# Altium PCB SPLCD V2.0.PcbDoc (part 1 of 2)
Units mm, origin at the board's own origin, x right, y up, seen from the top; angles counter-clockwise.
Board outline 130.07 x 120.05 mm, 4 copper layers (TopLayer, GND, PWR, BottomLayer); 221 components, 137 nets, 665 pads, 261 vias.
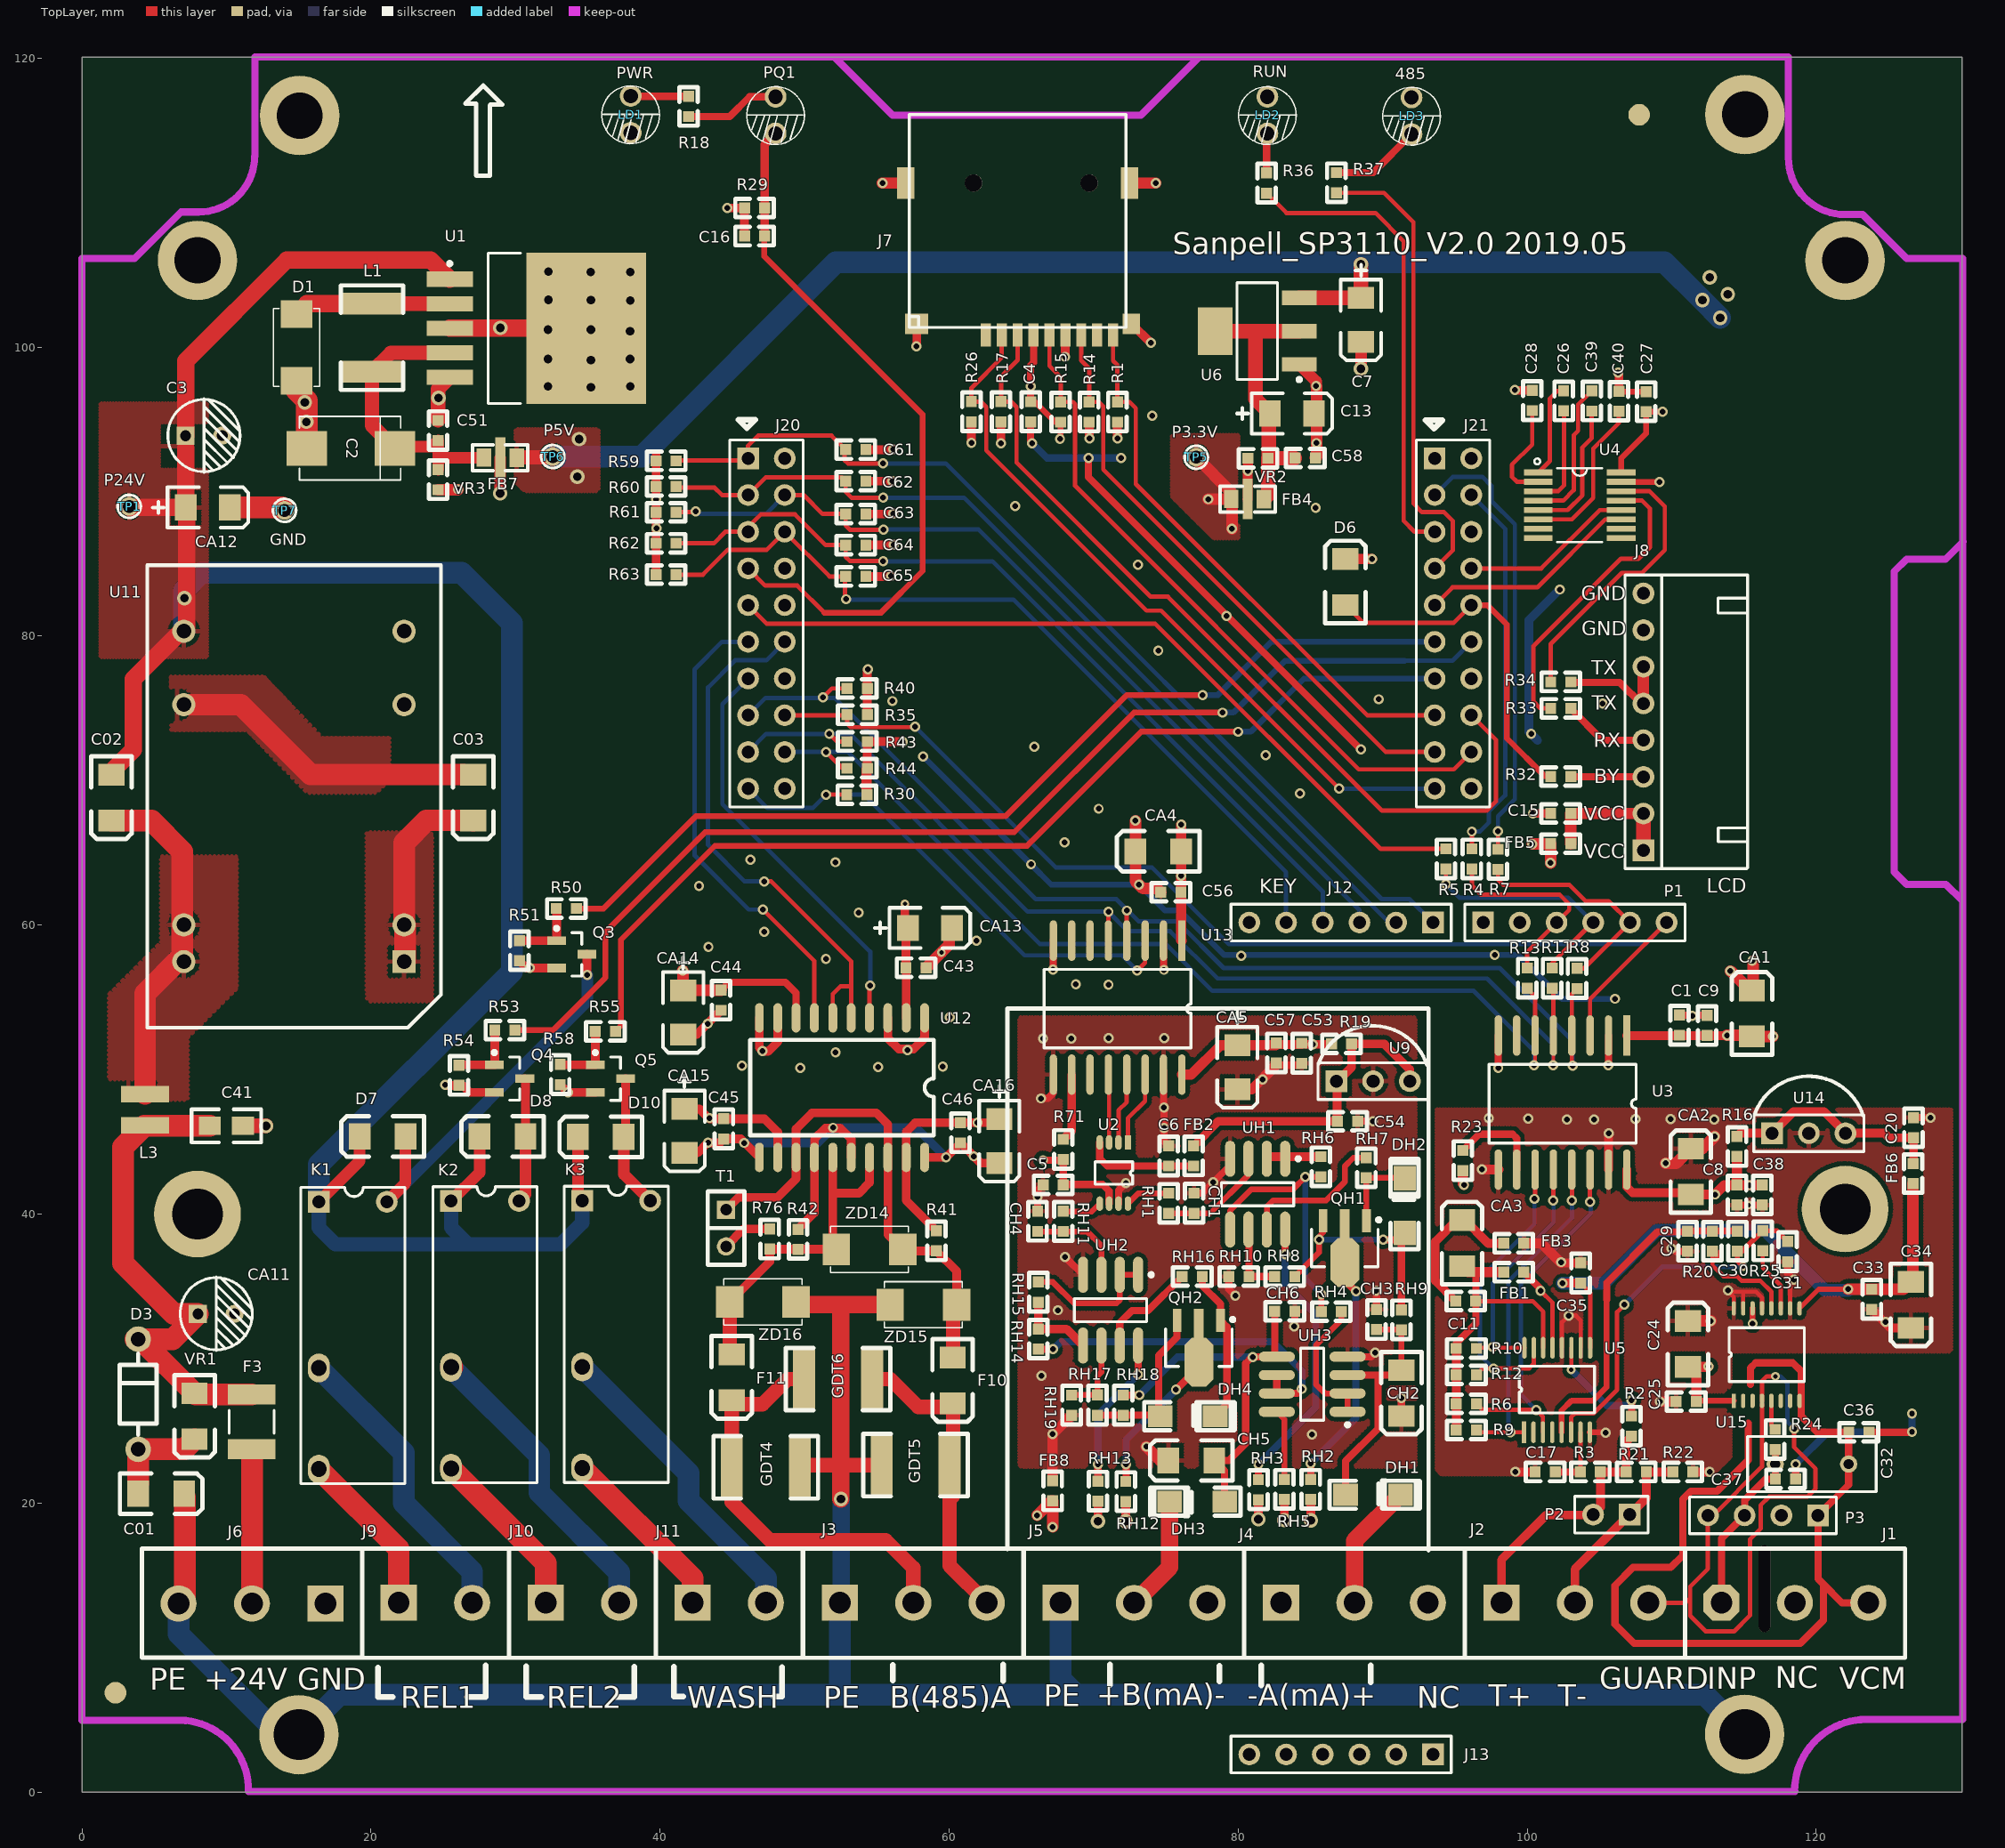
[diagram p0: TopLayer view]
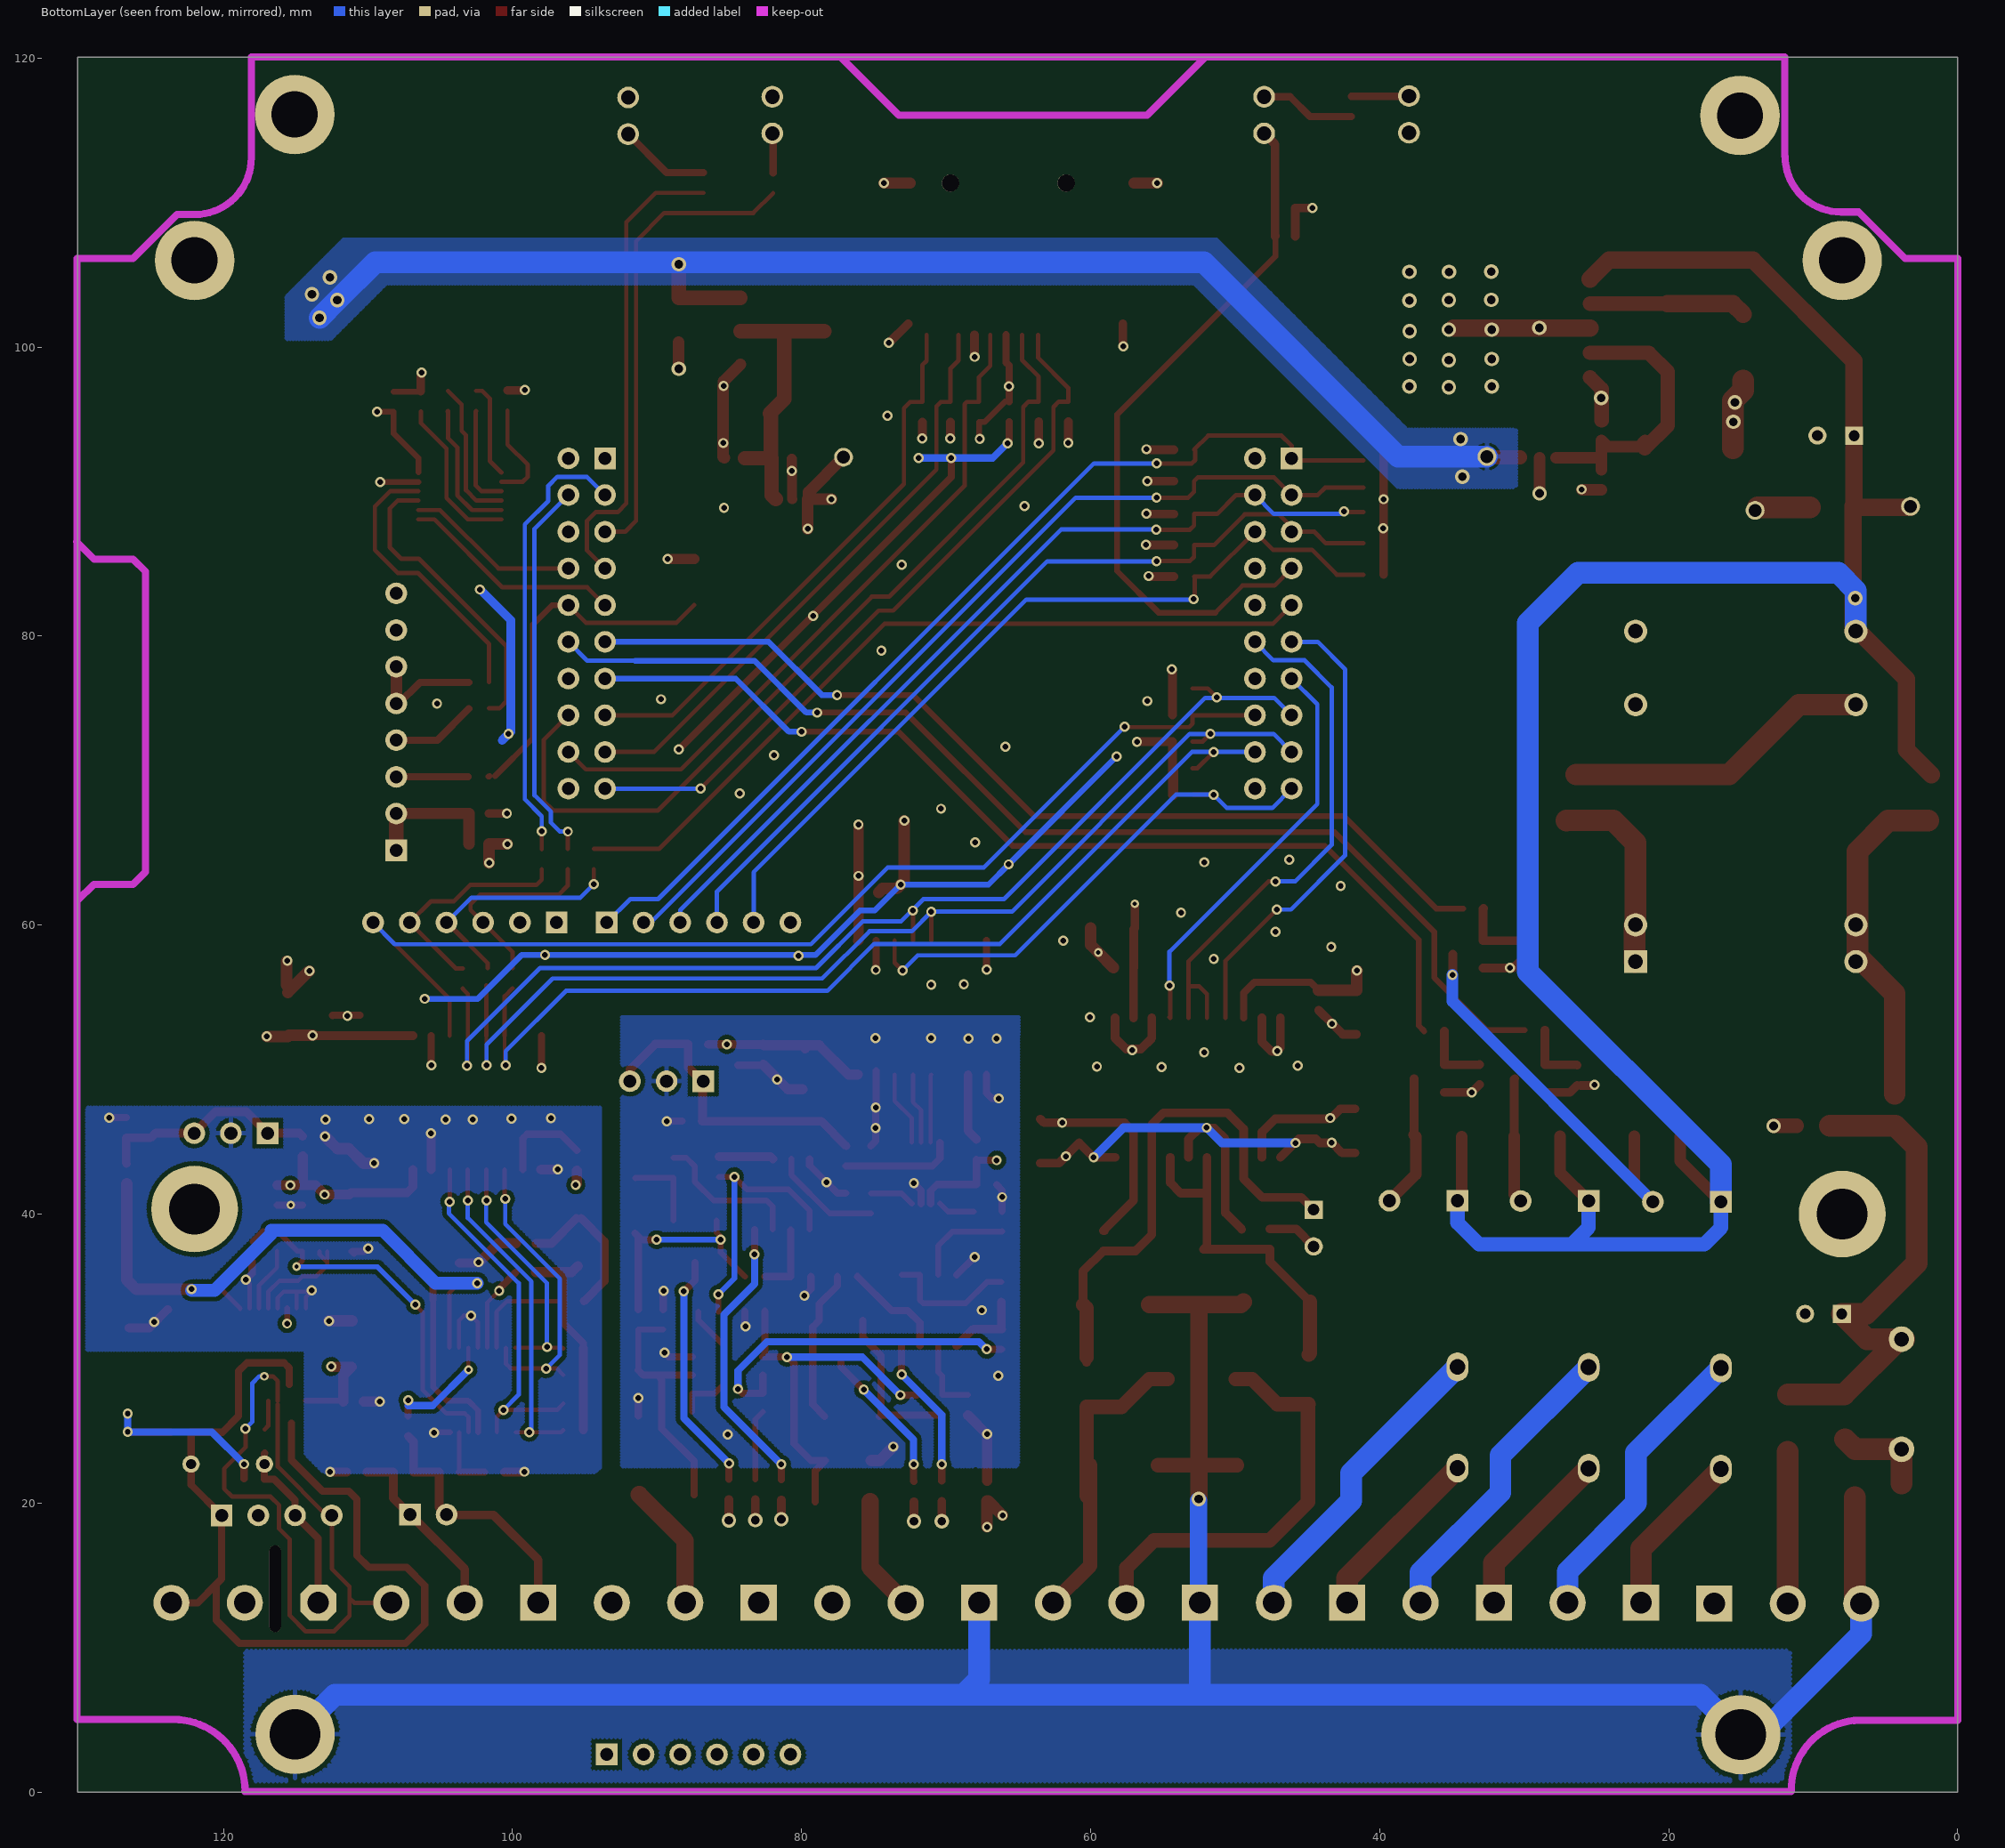
[diagram p1: BottomLayer view, seen from below]
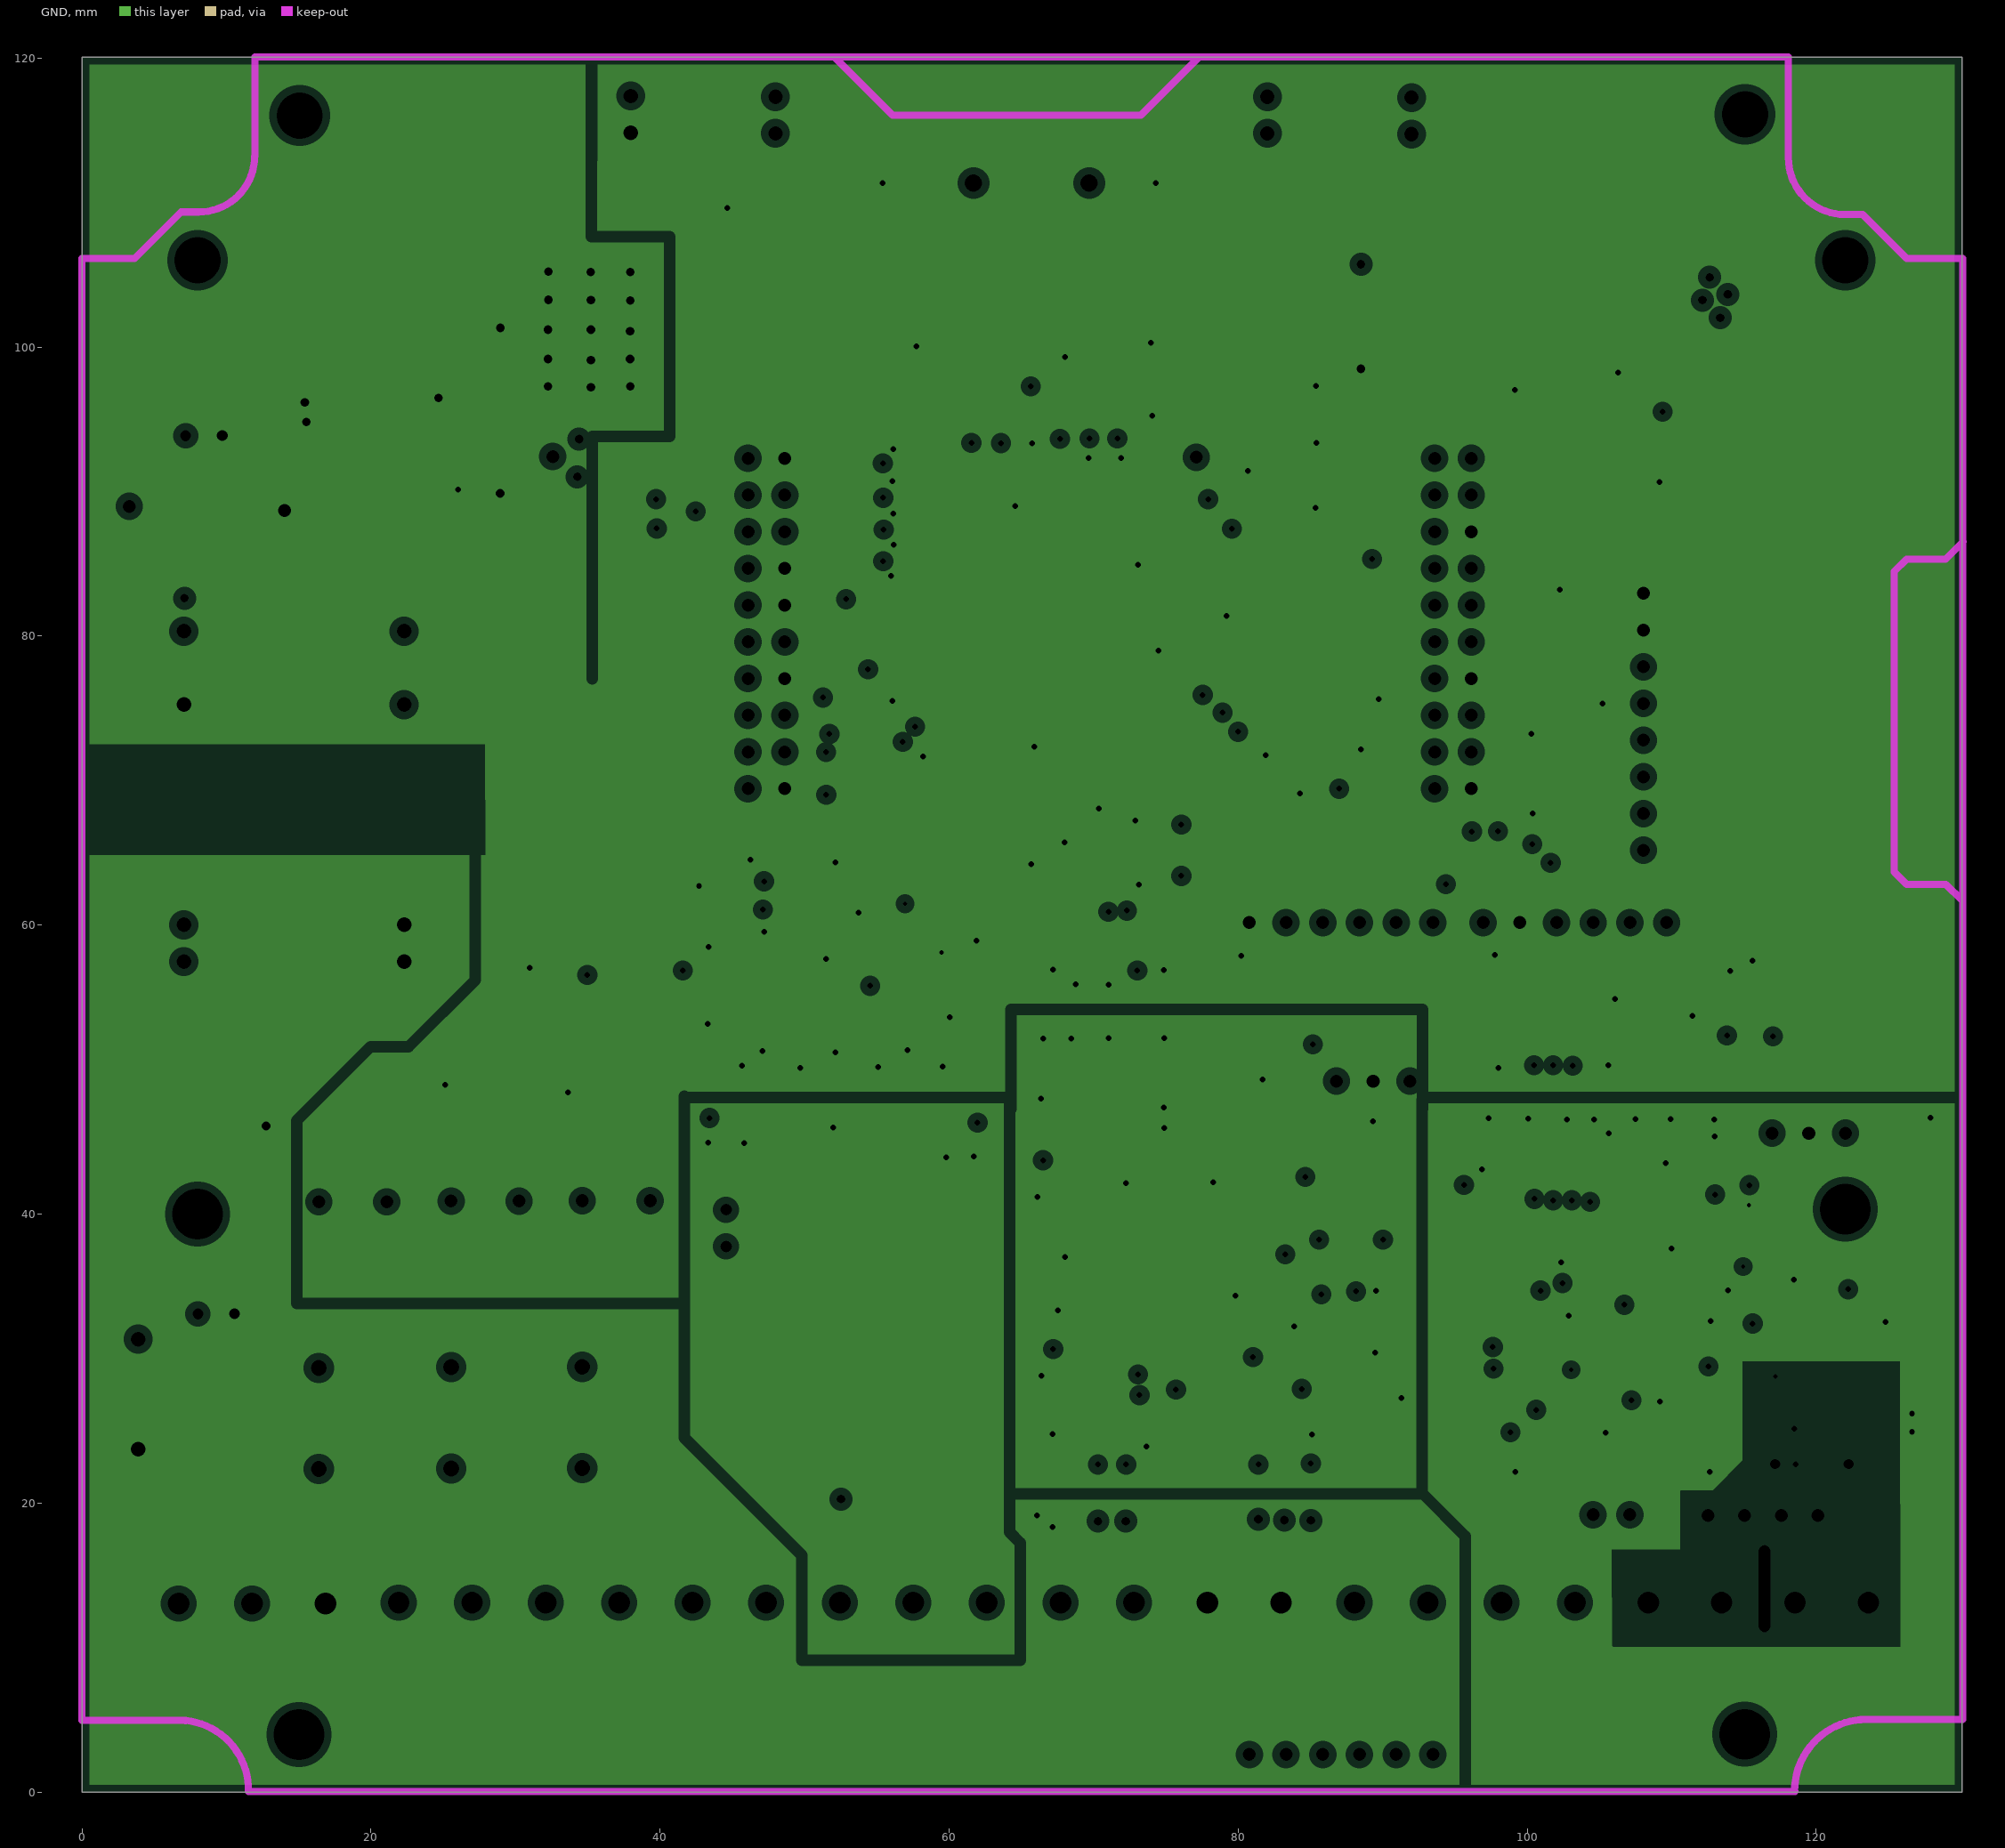
[diagram p2: GND, clearances drawn from the general rule]
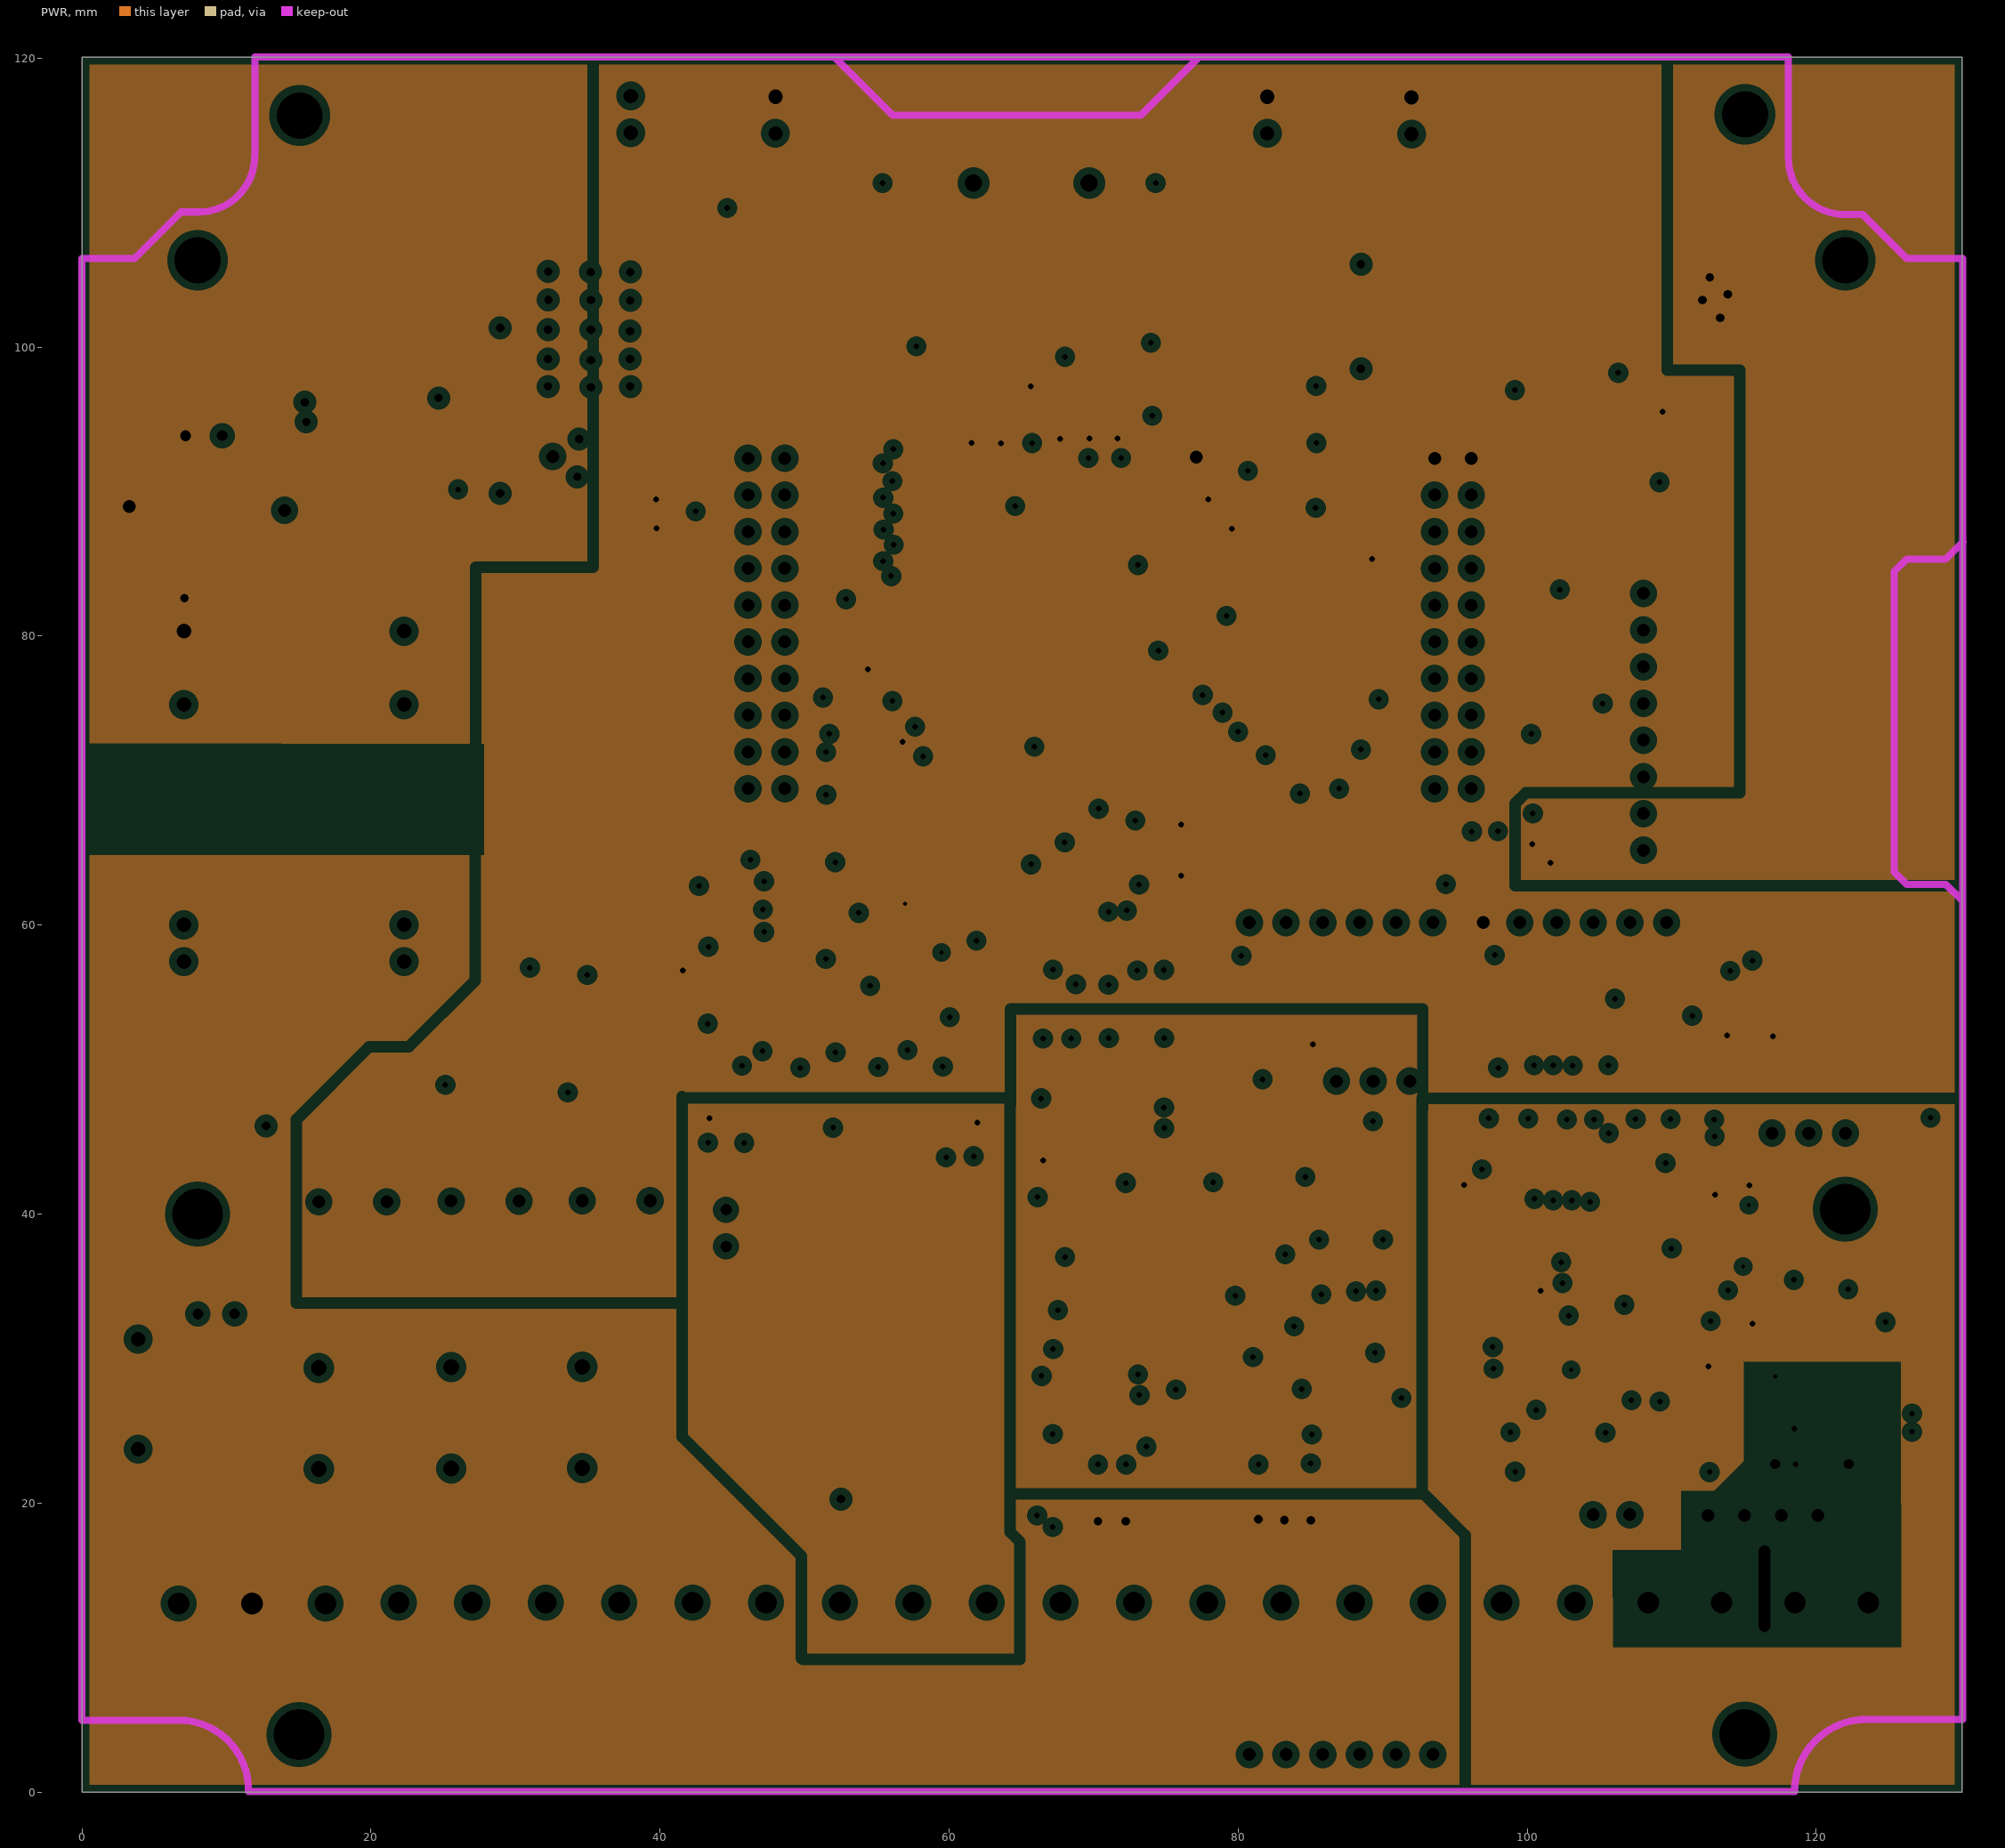
[diagram p3: PWR, clearances drawn from the general rule]

## Layer stack, top to bottom
TopLayer: signal copper 0.0356
Dielectric: core 0.32, FR-4, Dk 4.8
GND: plane copper 0.0356, net (Multiple Nets)
Dielectric: prepreg 0.32, FR-4, Dk 4.8
PWR: plane copper 0.0356, net (Multiple Nets)
Dielectric: core 0.32, FR-4, Dk 4.8
BottomLayer: signal copper 0.0356

## Board outline
0,0 130.075,0 130.075,120.05 0,120.05

## Design rules (kind name [scope] priority, off if disabled: settings)
Clearance Clearance_poly [InPolygon] p1: gap=0.3
Clearance [All] p2: gap=0.15
ComponentClearance [All] p1: gap=0.15 collisioncheckmode=3 verticalgap=0.254 showdistances=FALSE
FabricationTestPointUsage TestPointUsage [All] p1: valid=0 allowmultiple=FALSE
FabricationTestpoint Testpoint [All] p1: side=3 testpointundercomponent=TRUE minsize=1.016 maxsize=2.54 preferedsize=1.524 minholesize=0.508 maxholesize=1.016 preferedholesize=0.813 testpointgrid=0.025 allowsidetop=TRUE allowsidebottom=TRUE usegrid=TRUE gridtolerance=0
HoleSize [All] p1: absolutevalues=TRUE maxlimit=8 minlimit=0.025 maxpercent=80.000 minpercent=20.000
MinimumSolderMaskSliver [All] p1: minsoldermaskwidth=0.15
PlaneClearance [All] p1: clearance=0.5
PlaneConnect [All] p1: planeconnectstyle=Relief reliefexpansion=0.5 reliefentries=4 reliefconductorwidth=0.3 reliefairgap=0.3
PolygonConnect PolygonConnect_via [IsVia] p1: connectstyle=Direct reliefconductorwidth=0.254 reliefentries=4 polygonreliefangle="90 Angle"
PolygonConnect [All] p2: connectstyle=Relief reliefconductorwidth=0.3 reliefentries=4 polygonreliefangle="90 Angle"
RoutingVias [All] p1: holewidth=0.305 width=0.61 viastyle="Through Hole" minholewidth=0.254 minwidth=0.508 maxholewidth=2 maxwidth=5
SilkToSilkClearance [All] p1: silktosilkclearance=0
SilkscreenOverComponentPads [All] p1: minsilkscreentomaskgap=0
SolderMaskExpansion [All] p1: expansion=0.102
Width [All] p1: maxlimit=5.08 minlimit=0.1 preferedwidth=0.254
19 further rules are at their usual default settings.

## Classes and differential pairs
component class 06_POWER: C01 C2 C02 C03 C3 C7 C13 C41 C51 C58 CA11 CA12 D1 D3 F3 FB4 FB7 FB8 J6 L1 L3 LD1 R18 TP1 TP5 TP6 TP7 U1 U6 U11 VR1 VR2 VR3
component class 02_INTERFACE: C1 C4 C5 C6 C8 C9 C11 C15 C16 C17 C20 C24 C25 C26 C27 C28 C29 C30 C31 C32 C33 C34 C35 C36 C37 C38 C39 C40 C43 C44 C45 C46 C53 C54 C56 C57 C61 C62 C63 C64 C65 CA1 CA2 CA3 CA4 CA5 CA13 CA14 CA15 CA16 CH1 CH2 CH3 CH4 CH5 CH6 D6 D7 D8 D10 DH1 DH2 DH3 DH4 F10 F11 FB1 FB2 FB3 FB5 FB6 GDT4 GDT5 GDT6 J1 J2 J3 J4 J5 J7 J8 J9 J10 J11 J12 J13 J20 J21 K1 K2 K3 LD2 LD3 P1 P2 P3 PQ1 Q3 Q4 Q5 QH1 QH2 R1 R2 R3 R4 R5 R6 R7 R8 R9 R10 R11 R12 R13 R14 R15 R16 R17 R19 R20 R21 R22 R23 R24 R25 R26 R29 R30 R32 R33 R34 R35 R36 R37 R40 R41 R42 R43 R44 R50 R51 R53 R54 R55 R58 R59 R60 R61 R62 R63 R71 R76 RH1 RH2 RH3 RH4 RH5 RH6 RH7 RH8 RH9 RH10 RH11 RH12 RH13 RH14 RH15 RH16 RH17 RH18 RH19 T1 U2 U3 U4 U5 U9 U12 U13 U14 U15 UH1 UH2 UH3 ZD14 ZD15 ZD16

## Components (designator, comment, footprint, x,y, rotation, side; value= is the part's Value field where it differs from the comment)
C1 "10nF" 0603A 110.545,52.375 r90 top
C01 "1nF/2kV" 1206 6.95,20.65 r0 top
C2 "100uF/16V" D 21.65,93 r180 top
C02 "1nF/2kV" 1206 2.045,67.35 r270 top
C3 "100uF/50V" PCAP_100 7.175,93.875 r0 top
C03 "1nF/2kV" 1206 27.07,67.35 r270 top
C4 "0.1uF" 0603A 65.644,94.825 r90 top
C5 "0.1uF" 0603A 67.9,42.025 r180 top
C6 "0.1uF" 0603A 75.2,43.325 r90 top
C7 "10uF" 1206C 88.5,103.4 r270 top
C8 "0.1uF" 0603A 114.52,42.025 r270 top
C9 "0.1uF" 0603A 112.445,53.75 r270 top
C11 "0.1uF" 0603A 96.445,33.975 r180 top
C13 "22uF" 1206C 82.2,95.406 r0 top
C15 "0.1uF" 0603A 103.019,67.725 r180 top
C16 "0.1uF" 0603 47.244,107.675 r180 top
C17 "1uF" 0603A 101.945,22.15 r180 top
C20 "0.1uF" 0603A 126.725,45.275 r90 top
C24 "10uF" 1206 111.12,32.475 r90 top
C25 "0.1uF" 0603A 111.7,27.025 r180 top
C26 "0.1uF" 0603A 102.519,96.975 r270 top
C27 "0.1uF" 0603A 108.225,96.919 r270 top
C28 "0.1uF" 0603A 100.344,95.6 r90 top
C29 "0.1uF" 0603A 111.094,37.425 r90 top
C30 "100pF" 0603A 114.544,38.825 r270 top
C31 "0.1uF" 0603A 118.019,38.1 r270 top
C32 "1nF/2kV" RAD-0.2 119.7,22.7 r0 top
C33 "0.1uF" 0603A 123.85,34.8 r270 top
C34 "10uF" 1206 126.55,32.25 r270 top
C35 "0.1uF" 0603A 103.695,35.225 r90 top
C36 "1nF" 0603A 122.25,24.9 r0 top
C37 "1nF" 0603A 117.175,21.675 r0 top
C38 "0.1uF" 0603A 116.27,42.025 r270 top
C39 "0.1uF" 0603A 104.469,95.575 r90 top
C40 "0.1uF" 0603A 106.344,95.55 r90 top
C41 "1uF/50V" 0805 8.845,46.1 r0 top
C43 "0.1uF" 0603 57.02,57.05 r0 top
C44 "0.1uF" 0603 44.225,55.5 r270 top
C45 "0.1uF" 0603 44.42,46.597 r270 top
C46 "0.1uF" 0603 60.795,44.928 r90 top
C51 "0.1uF" 0603A 24.645,93.525 r90 top
C53 "0.1uF" 0603A 84.4,51.825 r270 top
C54 "0.1uF" 0603A 86.875,46.425 r0 top
C56 "0.1uF" 0603A 76.045,62.275 r180 top
C57 "0.1uF" 0603A 82.644,51.85 r270 top
C58 "0.1uF" 0603 83.95,92.331 r0 top
C61 "0.1uF" 0603A 52.844,92.9 r0 top
C62 "0.1uF" 0603A 52.844,90.725 r0 top
C63 "0.1uF" 0603A 52.844,88.45 r0 top
C64 "0.1uF" 0603A 52.844,86.3 r0 top
C65 "0.1uF" 0603A 52.844,84.125 r0 top
CA1 "10uF" 1206 115.55,55.345 r90 top
CA2 "10uF" 1206 111.32,44.4 r90 top
CA3 "10uF" 1206 95.495,39.45 r90 top
CA4 "10uF" 1206 73.02,65.1 r180 top
CA5 "10uF" 1206C 79.944,51.675 r270 top
CA11 "100uF/50V" PCAP_100 8.025,33.1 r0 top
CA12 "10uF/50V" 1206C 7.196,88.9 r0 top
CA13 "10uF" 1206C 57.145,59.8 r0 top
CA14 "10uF" 1206C 41.6,55.48 r270 top
CA15 "10uF" 1206C 41.695,47.275 r270 top
CA16 "10uF" 1206C 63.475,46.575 r270 top
CH1 "0.1uF" 0603A 76.95,41.45 r270 top
CH2 "10uF/50V" 1206 91.3,26.15 r270 top
CH3 "0.1uF" 0603A 89.575,33.4 r270 top
CH4 "0.1uF" 0603A 66.125,40.2 r270 top
CH5 "10uF/50V" 1206 75.3,22.95 r180 top
CH6 "0.1uF" 0603A 83.925,33.275 r180 top
D1 "SS34" ZD 14.85,97.675 r90 top
D3 "1N4007" 1N4007 3.895,23.725 r90 top
D6 "1N4148" 1206 87.425,85.2 r90 top
D7 "1N4148" 1206 19.344,45.375 r180 top
D8 "1N4148" 1206 27.644,45.375 r180 top
D10 "1N4148" 1206 34.444,45.35 r180 top
DH1 "1N4148" 1206D 87.625,20.575 r0 top
DH2 "1N4148" 1206D 91.525,38.875 r90 top
DH3 "1N4148" 1206D 78.875,20.1 r180 top
DH4 "1N4148" 1206D 74.8,26 r0 top
F3 "CC12H3A" 1812#1 11.745,25.625 r90 top
F10 "FUSE1" 1206 60.244,27.025 r270 top
F11 "FUSE1" 1206 44.969,27.25 r270 top
FB1 "BLM18PG600SN1" 0603A 99.77,35.975 r180 top
FB2 "BLM18PG600SN1" 0603A 76.925,44.725 r270 top
FB3 "BLM18PG600SN1" 0603A 99.77,37.975 r180 top
FB4 "NFM21PC105B1C3" NFM21PC105 81.8,89.481 r180 top
FB5 "BLM18PG600SN1" 0603A 103.019,65.625 r180 top
FB6 "BLM18PG600SN1" 0603A 126.7,43.5 r270 top
FB7 "NFM21PC105B1C3" NFM21PC105 27.802,92.34 r0 top
FB8 "BLM18PG600SN1" 0603 67.17,20.15 r90 top
GDT4 "SMD1812-091" 1812#2 44.969,22.475 r0 top
GDT5 "SMD1812-091" 1812#2 55.332,22.628 r0 top
GDT6 "SMD1812-091" 1812#2 49.97,28.575 r0 top
J1 "P3-5.08" PH3-5.08mm#1 113.444,13.1 r0 top locked
J2 "P3-5.08" PH3-5.08mm#2 98.219,13.1 r0 top
J3 "P3-5.08" PH3-5.08mm#2 52.444,13.1 r0 top
J4 "P3-5.08" PH3-5.08mm#2 82.969,13.1 r0 top
J5 "P3-5.08" PH3-5.08mm#2 67.719,13.1 r0 top
J6 "P3-5.08" PH3-5.08mm#2 16.844,13.05 r180 top
J7 "Header 10" "TF Socket" 64.744,100.85 r180 top
J8 "XH-8AW" HDR1X8 108.041,65.175 r90 top
J9 "P2-5.08" PH2-5.08mm 21.919,13.1 r0 top
J10 "P2-5.08" PH2-5.08mm 32.094,13.1 r0 top
J11 "P2-5.08" PH2-5.08mm 42.244,13.1 r0 top
J12 "Header 6" HDR1X6 93.475,60.175 r180 top
J13 "Header 6" HDR1X6 93.475,2.6 r180 top (schematic designator J12)
J20 "Header 10X2" HDR2X10 46.094,92.3 r270 top
J21 "Header 10X2" HDR2X10 93.594,92.3 r270 top
K1 "ALDP124" ALDP124 15.144,21.35 r0 top
K2 "ALDP124" ALDP124 24.294,21.4 r0 top
K3 "ALDP124" ALDP124 33.37,21.425 r0 top
L1 "47uH/1.5A" 1812#2 20.075,103 r270 top
L3 "4.7uH" LPS3010 4.37,46.15 r90 top
LD1 "PWR" LED 37.969,117.375 r270 top
LD2 "RUN" LED 82.019,117.325 r270 top
LD3 "485" LED 91.995,117.275 r270 top
P1 "Header 6" HDR1X6 96.95,60.175 r0 top
P2 "Header 2" HDR1X2 107.1,19.2 r180 top
P3 "Header 4" HDR1X4 120.125,19.15 r180 top
PQ1 "MI3-P" LED 47.994,117.325 r270 top
Q3 "MMBT3904" SOT23_N 33.894,57.975 r0 top
Q4 "MMBT3904" SOT23_N 29.594,49.375 r0 top
Q5 "MMBT3904" SOT23_N 36.569,49.375 r0 top
QH1 "2SD1624" SOT89M 87.375,37.65 r270 top
QH2 "2SD1624" SOT89M 77.275,30.75 r270 top
R1 "10K" 0603A 71.644,96.2 r270 top
R2 "0R" 0603A 107.22,24.625 r90 top
R3 "10K" 0603A 105.07,22.15 r180 top
R4 "0R" 0603A 96.175,65.275 r270 top
R5 "0R" 0603A 94.375,65.275 r270 top
R6 "100K" 0603A 95.095,26.875 r0 top
R7 "0R" 0603A 97.975,65.25 r270 top
R8 "0R" 0603A 103.45,57 r270 top
R9 "100K" 0603A 95.095,25.05 r0 top
R10 "100K" 0603A 95.095,30.7 r0 top
R11 "0R" 0603A 101.725,57.025 r270 top
R12 "100K" 0603A 95.095,28.875 r0 top
R13 "0R" 0603A 100,57.025 r270 top
R14 "10K" 0603A 69.694,96.2 r270 top
R15 "10K" 0603A 67.719,96.2 r270 top
R16 "330R" 0603A 114.52,45.375 r270 top
R17 "10K" 0603A 63.594,96.225 r270 top
R18 "1K" 0603A 41.969,117.35 r270 top
R19 "330R" 0603A 87.85,51.775 r180 top
R20 "1K" 0603A 112.819,37.425 r90 top
R21 "5K 0.1%" 0603A 108.245,22.15 r180 top
R22 "0R" 0603A 110.07,22.15 r0 top
R23 "4.7K" 0603A 95.545,44.4 r270 top
R24 "1K" 0603A 117.15,23.7 r90 top
R25 "1K" 0603A 116.294,37.45 r90 top
R26 "10K" 0603A 61.544,96.225 r270 top
R29 "10K" 0603A 45.844,109.625 r0 top
R30 "47K" 0603A 52.925,69.025 r0 top
R32 "NC" 0603A 103.019,70.275 r180 top
R33 "100R" 0603A 103.025,75 r180 top
R34 "100R" 0603A 103.025,76.825 r180 top
R35 "47K" 0603A 54.344,74.55 r180 top
R36 "1K" 0603A 81.969,110.65 r90 top
R37 "1K" 0603A 86.794,110.675 r90 top
R40 "47K" 0603A 54.344,76.375 r180 top
R41 "47K" 0603 59.119,38.85 r270 top
R42 "47K" 0603 49.544,37.55 r90 top
R43 "47K" 0603A 54.344,72.7 r180 top
R44 "47K" 0603A 54.344,70.85 r180 top
R50 "1K" 0603A 32.82,61.15 r0 top
R51 "100K" 0603A 30.269,58.925 r270 top
R53 "1K" 0603A 28.569,52.725 r0 top
R54 "100K" 0603A 26.094,50.3 r270 top
R55 "1K" 0603A 35.519,52.65 r0 top
R58 "100K" 0603A 33.094,50.35 r270 top
R59 "47K" 0603A 41.125,92.125 r180 top
R60 "47K" 0603A 41.119,90.35 r180 top
R61 "47K" 0603A 41.119,88.575 r180 top
R62 "47K" 0603A 41.119,86.425 r180 top
R63 "47K" 0603A 41.119,84.25 r180 top
R71 "4.7K" 0603A 67.9,43.775 r90 top
R76 "120R" 0603 47.594,37.575 r90 top
RH1 "10K" 0603A 75.2,40.05 r90 top
RH2 "100R 1%" 0603A 85.025,20.25 r90 top
RH3 "49.9" 0603A 81.4,20.225 r90 top
RH4 "100K" 0603A 85.75,33.25 r0 top
RH5 "49.9" 0603A 83.2,20.25 r90 top
RH6 "100K 0.1%" 0603A 85.725,42.575 r90 top
RH7 "10K" 0603A 88.875,43.9 r270 top
RH8 "100K" 0603A 82.525,35.675 r0 top
RH9 "100R 1%" 0603A 91.3,33.375 r270 top
RH10 "100K" 0603A 80.75,35.675 r180 top
RH11 "10K" 0603A 67.9,38.8 r90 top
RH12 "100R 1%" 0603A 72.225,20.1 r90 top
RH13 "49.9" 0603A 70.3,20.125 r90 top
RH14 "100K" 0603A 66.175,32.05 r270 top
RH15 "100K 0.1%" 0603A 66.175,33.9 r90 top
RH16 "10K" 0603A 76.125,35.675 r0 top
RH17 "100K" 0603A 70.275,27.475 r270 top
RH18 "100R 1%" 0603A 72.05,26.075 r90 top
RH19 "100K" 0603A 68.475,27.472 r270 top
T1 "" SIP2 44.569,40.3 r270 top
TP1 "P24V" "TEST POINT" 3.275,88.975 r0 top
TP5 "P3.3V" "TEST POINT" 77.1,92.375 r90 top
TP6 "P5V" "TEST POINT" 32.575,92.425 r270 top
TP7 "GND" "TEST POINT" 14.025,88.7 r0 top
U1 "LM2596S-5.0" TS5B_N 31.45,101.3 r0 top
U2 "LT2602IMS8" LT2602 71.35,42.825 r270 top
U3 "ADuM5401ARWZ" ADUM1401 106.895,52.35 r270 top
U4 "SP3232EEY-L" TSSOP-16 100.769,91.325 r0 top
U5 "AD7793BRU" AD7793 102.07,27.825 r90 top
U6 "LM1117IMP-3.3" MP04A_N 81.325,101.1 r180 top
U9 "TL431BCLP" HDR1X3 86.8,49.2 r0 top
U11 "URB2424ZP-6WR3" URB2424ZP-6WR3 22.295,57.473 r90 top
U12 "ADM2587E" SOL-20 58.305,53.575 r270 top
U13 "ADuM5401ARW" ADUM1401 76.105,58.925 r270 top
U14 "TL431BCLP" HDR1X3 116.945,45.6 r0 top
U15 "LMP91200" LMP91200 116.57,30.275 r0 top
UH1 "LM2904DMR2" SO8_M 81.35,41.375 r270 top
UH2 "LM2904DMR2" SO8_M 71.175,33.35 r270 top
UH3 "LM2904DMR2" SO8_M 85.125,28.225 r180 top
VR1 "V42MLA1206N" 1206 7.795,24.55 r270 top
VR2 "V3.5MLA0603N" 0603 80.675,92.306 r0 top (schematic designator VA1)
VR3 "V5.5MLA0603N" 0603 24.644,90.125 r90 top (schematic designator VA2)
ZD14 "SMBJ12" ZD 56.794,37.55 r180 top
ZD15 "SMBJ12" ZD 60.519,33.725 r180 top
ZD16 "SMBJ12" ZD 49.419,33.925 r180 top

## Footprints (in the part's own frame and the unit in brackets; to place one, negate y for a bottom-side part, rotate by r counter-clockwise, add the part's x,y. Pads: shape width x height; smd on the part's side, far side on the other; paste and mask are expansions set on the pad)
1N4007 [mil]
  round 70 hole 40: 1(0,0) 2(300,0)
  silkscreen extent 40,-50 260,50
0603 [mil]
  rect 30x30 smd: 1(0,0) 2(55,0)
  silkscreen extent -25,-25 80,25
0603A [mil]
  rect 30x30 smd: 1(0,0) 2(55,0)
  silkscreen extent -25,-25 80,25
0805 [mil]
  rect 60x50 smd: 1(0.39,0.31) 2(90.39,0.31)
  silkscreen extent -50,-45 140,45
1206 [mm]
  rect 1.5x1.8 smd: 1(-3.048,0) 2(0.127,0)
  silkscreen extent -4.32,-1.4 1.4,1.4
1206C [mm]
  rect 1.5x1.8 smd: 1(0,0) 2(3.048,0)
  silkscreen extent -2.29,-1.4 4.32,1.4
1206D [mm]
  rect 1.7x1.524 smd: 1(-0.19,0.003) 2(3.61,0.003)
  silkscreen extent -1.3,-0.97 4.96,0.99
1812#1 [mm] "Chip Capacitor, Body 4.5x3.2mm, IPC High Density"
  rect 1.4x3.3 smd: 1(-1.9,0) 2(1.9,0)
  silkscreen extent -0.8,-1.55 0.8,1.55, body extent -2.4,-1.7 2.4,1.7, height 1.4
1812#2 [mm]
  rect 1.524x4.175 smd: 1(0,0) 2(4.699,0)
  silkscreen extent -1.27,-2.16 5.97,2.16
AD7793 [mm]
  rect 1.5x0.3 smd: 1(-2.921,2.286)
  oval 1.5x0.3 smd: 2(-2.921,1.636) 3(-2.921,0.986) 4(-2.921,0.336) 5(-2.921,-0.314) 6(-2.921,-0.964) 7(-2.921,-1.614) 8(-2.921,-2.264) 9(2.921,-2.286) 10(2.921,-1.636) 11(2.921,-0.986) 12(2.921,-0.336) 13(2.921,0.314) 14(2.921,0.964) 15(2.921,1.614) 16(2.921,2.264)
  silkscreen extent -1.59,-2.59 1.64,2.61
ADUM1401 [mm]
  rect 2.8x0.51 smd: 1(0,0)
  oval 2.8x0.51 smd: 2(0,-1.27) 3(0,-2.54) 4(0,-3.81) 5(0,-5.08) 6(0,-6.35) 7(0,-7.62) 8(0,-8.89) 9(9.271,-8.89) 10(9.271,-7.62) 11(9.271,-6.35) 12(9.271,-5.08) 13(9.271,-3.81) 14(9.271,-2.54) 15(9.271,-1.27) 16(9.271,0)
  silkscreen extent 1.99,-9.53 7.43,0.64
ALDP124 [mm]
  oval 1.5x2 hole 1.1: 1(1.25,8) 7(1.25,1)
  round 1.5 hole 0.9: 3(5.95,19.5)
  rect 1.5x1.5 hole 0.9: 5(1.25,19.5)
  silkscreen extent 0,0 7.2,20.5
D [mil]
  rect 110x94.49 smd: 1(0,0) 2(240,0)
  silkscreen extent -16,-87 260,87
HDR1X2 [mm] "Connector; Header; 2 Position"
  rect 1.5x1.5 hole 0.9: 1(0,0)
  round 1.5 hole 0.9: 2(2.54,0)
  silkscreen extent -1.27,-1.27 3.81,1.27
HDR1X3 [mm] "Connector; Header; 3 Position"
  rect 1.5x1.5 hole 0.9: 1(0,0)
  round 1.5 hole 0.9: 2(2.54,0) 3(5.08,0)
  silkscreen extent -1.27,-1.27 6.35,1.27
HDR1X4 [mm] "Connector; Header; 4 Position"
  rect 1.5x1.5 hole 0.9: 1(0,0)
  round 1.5 hole 0.9: 2(2.54,0) 3(5.08,0) 4(7.62,0)
  silkscreen extent -1.27,-1.27 8.89,1.27
HDR1X6 [mm] "Connector; Header; 6 Position"
  rect 1.5x1.5 hole 0.9: 1(0,0)
  round 1.5 hole 0.9: 2(2.54,0) 3(5.08,0) 4(7.62,0) 5(10.16,0) 6(12.7,0)
  silkscreen extent -1.27,-1.27 13.97,1.27
HDR1X8 [mm] "Connector; Header; 8 Position"
  rect 1.5x1.5 hole 0.9: 1(0,0)
  round 1.5 hole 0.9: 2(2.54,0) 3(5.08,0) 4(7.62,0) 5(10.16,0) 6(12.7,0) 7(15.24,0) 8(17.78,0)
  silkscreen extent -1.27,-1.27 19.05,1.27
HDR2X10 [mm] "Connector; Header; 10x2 Position"
  rect 1.5x1.5 hole 0.9: 1(0,0)
  round 1.5 hole 0.9: 2(0,2.54) 3(2.54,0) 4(2.54,2.54) 5(5.08,0) 6(5.08,2.54) 7(7.62,0) 8(7.62,2.54) 9(10.16,0) 10(10.16,2.54) 11(12.7,0) 12(12.7,2.54) 13(15.24,0) 14(15.24,2.54) 15(17.78,0) 16(17.78,2.54) 17(20.32,0) 18(20.32,2.54) 19(22.86,0) 20(22.86,2.54)
  silkscreen extent -1.27,-1.27 24.13,3.81
LED [mm]
  round 1.5 hole 1: 1(0,0) 2(2.54,0)
  silkscreen extent -0.7,-2 3.3,2
LMP91200 [mm]
  rect 0.3x1 smd: 1(-2.275,-3.2)
  oval 0.3x1 smd: 2(-1.625,-3.2) 3(-0.975,-3.2) 4(-0.325,-3.2) 5(0.325,-3.2) 6(0.975,-3.2) 7(1.625,-3.2) 8(2.275,-3.2) 9(2.275,3.2) 10(1.625,3.2) 11(0.975,3.2) 12(0.325,3.2) 13(-0.325,3.2) 14(-0.975,3.2) 15(-1.625,3.2) 16(-2.275,3.2)
  silkscreen extent -2.6,-1.87 2.6,1.87
LPS3010 [mm]
  rect 1.14x3.3 smd: 1(0,0) 2(2.16,0)
LT2602 [mm]
  rect 1x0.45 smd: 1(-2.127,1.023)
  oval 1x0.45 smd: 2(-2.127,0.373) 3(-2.127,-0.277) 4(-2.127,-0.927) 5(2.103,-0.927) 6(2.103,-0.277) 7(2.103,0.373) 8(2.103,1.023)
  silkscreen extent -0.79,-1.25 0.77,1.35
MP04A_N [mm] "SOT223, 4-Leads, Body 6.5x3.5mm, Pitch 2.3mm, Lead Span 7mm, IPC Medium Density"
  rect 2.4x1 smd: 1(-2.9,2.3) 2(-2.9,0) 3(-2.9,-2.3)
  rect 2.4x3.3 smd: 4(2.9,0)
  silkscreen extent -3.03,-3.35 1.4,3.47, body extent -1.85,-3.35 1.85,3.35, height 1.8
NFM21PC105 [mm]
  rect 1x1.27 smd: 1(0.01,0.008) 2(2.286,0)
  rect 0.7x2.8 smd: 3(1.143,0)
  silkscreen extent -0.76,-0.89 3.05,0.89
PCAP_100 [mm]
  rect 1.25x1.25 hole 0.75: 1(0.001,-0.009)
  round 1.25 hole 0.75: 2(2.54,0)
  silkscreen extent -1.23,-2.54 3.77,2.54
PH2-5.08mm [mm]
  rect 2.5x2.5 hole 1.5: 1(0,0)
  round 2.5 hole 1.5: 2(5.08,0)
  silkscreen extent -2.54,-3.81 7.62,3.75
PH3-5.08mm#1 [mm]
  oct 2.5x2.5 hole 1.5: 1(0,0)
  round 2.5 hole 1.5: 2(5.08,0) 3(10.16,0)
  silkscreen extent -2.54,-3.81 12.7,3.75
PH3-5.08mm#2 [mm]
  rect 2.5x2.5 hole 1.5: 1(0,0)
  round 2.5 hole 1.5: 2(5.08,0) 3(10.16,0)
  silkscreen extent -2.54,-3.81 12.7,3.75
RAD-0.2 [mm] "Radial Cap, Thru-Hole; 2 Leads; 0.2 in Pin Spacing"
  round 1.2 hole 0.7: 1(-2.54,0) 2(2.54,0)
  silkscreen extent -4.44,-1.91 4.44,1.91
SIP2 [mil]
  rect 50x50 hole 32: 1(0,0)
  round 50 hole 32: 2(100,0)
  silkscreen extent -50,-50 150,50
SO8_M [mm] "SOIC, 8-Leads, Body 4.9x3.9mm, Pitch 1.27mm, IPC Low Density"
  oval 2.5x0.7 smd: 1(-2.45,1.905) 2(-2.45,0.635) 3(-2.45,-0.635) 4(-2.45,-1.905) 5(2.45,-1.905) 6(2.45,-0.635) 7(2.45,0.635) 8(2.45,1.905)
  silkscreen extent -2.57,-2.5 0.8,2.93, body extent -2,-2.5 2,2.5, height 1.75
SOL-20 [mil]
  oval 80x24 smd: 1(0,0) 2(0,-50) 3(0,-100) 4(0,-150) 5(0,-200) 6(0,-250) 7(0,-300) 8(0,-350) 9(0,-400) 10(0,-450) 11(380,-450) 12(380,-400) 13(380,-350) 14(380,-300) 15(380,-250) 16(380,-200) 17(380,-150) 18(380,-100) 19(380,-50) 20(380,0)
  silkscreen extent 60,-475 320,25
SOT23_N [mm] "SOT23, 3-Leads, Body 2.9x1.3mm, Pitch 0.95mm, Lead Span 2.3mm, IPC Medium Density"
  rect 1.3x0.6 smd: 1(-1.05,0.95) 2(-1.05,-0.95) 3(1.05,0)
  silkscreen extent -1.17,-1.5 0.7,1.92, body extent -0.7,-1.5 0.7,1.5, height 1.1
SOT89M [mm] "SOT89, 3-Leads, Body 4.5x2.4 mm, Pitch 1.5mm, Lead Span 4.1mm, IPC Low Density"
  rect 1.6x0.6 smd: 1(-1.9,1.5) 3(-1.9,-1.5)
  rect 2x0.7 smd: 2(-1.7,0)
  oct 3.4x2 smd: 2(1,0)
  silkscreen extent -2.07,-2.3 1.3,2.48, body extent -1.3,-2.3 1.3,2.3, height 1.6
"TEST POINT" [mm]
  round 1.3 hole 0.9: 1(0,0)
  silkscreen extent -0.8,-0.8 0.8,0.8
"TF Socket" [mm]
  rect 0.7x1.6 smd: 1(2.2,0) 2(1.1,0) 3(0,0) 4(-1.1,0) 5(-2.2,0) 6(-3.3,0) 7(-4.4,0) 8(-5.5,0) 9(-6.6,0)
  rect 1.2x1.4 smd: 10(-7.877,-0.762)
  rect 1.2x2.2 smd: 10(-7.75,-10.5) 10(7.75,-10.5)
  rect 1.6x1.4 smd: 10(6.977,-0.762)
  round 1.2 hole 1.2: ""(-4.95,-10.5) ""(3.05,-10.5)
  silkscreen extent -7.49,-15.24 7.49,-0.51
TS5B_N [mm] "D2-PAK, 6-Leads, Body 8.6x10.2mm, Pitch 1.7mm, Lead Span 14.1mm, IPC Medium Density"
  rect 3.2x1.05 smd: 1(-6,3.4) 2(-6,1.7) 3(-6,0) 4(-6,-1.7) 5(-6,-3.4)
  rect 8.3x10.45 smd: 6(3.45,0)
  silkscreen extent -6.12,-5.2 -1.1,5.2, body extent -3.35,-5.2 6.05,5.2, height 4.65
TSSOP-16 [mil]
  rect 78x16 smd: 1(0,0) 2(0,-25.59) 3(0,-51.18) 4(0,-76.77) 5(0,-102.36) 6(0,-127.95) 7(0,-153.54) 8(0,-179.13) 9(226,-179.13) 10(226,-153.54) 11(226,-127.95) 12(226,-102.36) 13(226,-76.77) 14(226,-51.18) 15(226,-25.59) 16(226,0)
  silkscreen extent -11,-190 174,38
URB2424ZP-6WR3 [mm] "isolated DC-DC converter, 6W"
  rect 1.6x1.6 hole 1.016: 2(0,0)
  round 1.6 hole 1.016: 3(2.54,0) 9(17.78,0) 11(22.86,0) 14(22.86,15.24) 16(17.78,15.24) 22(2.54,15.24) 23(0,15.24)
  silkscreen extent -4.57,-2.54 27.43,17.78
ZD [mm]
  rect 1.9x2.2 smd: 1(0,0) 2(4.6,0)
  silkscreen extent -0.4,-1.6 5,1.6

## Part data
C1 C8 C9 C11 C17 C43 C44 C45 C46: library part C, "电?"
C01 C02 C03 C4 C5 C6 C16 C20 C25 C29 C30 C31 C32 C33 C35 C36 C37 C38 C41 C51 C53 C54 C56 C57 C58 CH1 CH3 CH4 CH6: library part CAP, "Capacitor"
C2 C3 CA11 CA12 CA13 CA14 CA15 CA16 CH2 CH5: library part C, "极?"
C7 C13 C24 C34 CA1 CA2 CA3 CA4 CA5: library part CAPE, "极?"
C15 C61 C62 C63 C64 C65: library part Cap, "Capacitor, X7R Ceramic"
C26 C28 C39 C40: library part Cap, "'Capacitor, X7R Ceramic"
C27: library part CAP, "'Capacitor, X7R Ceramic"
D1: library part "D Schottky", "Schottky Diode"
D3: library part "Diode 1N4007", "1 Amp General Purpose Rectifier"
D6 D7 D8 D10: library part "Diode 1N4148", "High Conductance Fast Diode"
DH1 DH2 DH3 DH4: library part "Diode 1N4001", "1 Amp General Purpose Rectifier"
F3: library part FUSE1, "Fuse, 3A, 63Vdc"
F10 F11: "Fuse"
FB1 FB3 L3: library part INDUCTOR
FB2 FB4 FB5 FB6 FB7 FB8 L1: library part Inductor, "Inductor"
GDT4 GDT5 GDT6: library part BT90
J1 J2 J3 J4 J5 J6 QH1 QH2: library part "Header 3", "Header, 3-Pin"
J7: "Header, 10-Pin"
J8: library part "Header 8", "Header, 8-Pin"
J9 J10 J11: library part "Header 2", "Header, 2-Pin"
J12 J13 P1: "Header, 6-Pin"
J20 J21: "Header, 10-Pin, Dual row"
K1 K2 K3: library part S1A120000, "24V coil, 5A SPST Relay"
LD1 LD2 LD3: library part LED0, "Typical INFRARED GaAs LED"
P2: "Header, 2-Pin"
P3: "Header, 4-Pin"
PQ1: library part "Photo NPN", "NPN Phototransistor"
Q3 Q4 Q5: "NPN Switching Transistor"
R1 R4 R5 R7 R8 R11 R13 R14 R15 R17 R18 R26 R29 R30 R32 R33 R34 R35 R36 R37 R40 R43 R44 R50 R51 R53 R54 R55 R58 R59 R60 R61 R62 R63: library part RES, "电?"
R2 R3 R6 R9 R10 R12 R20 R21 R22 R23 R24 R25 R41 R42 R76: library part R, "电?"
R16 R19 R71 RH1 RH2 RH3 RH4 RH5 RH6 RH8 RH9 RH10 RH11 RH12 RH13 RH14 RH15 RH17 RH18 RH19: library part RE, "电?"
RH7 RH16: library part R, "Resistor"
T1: library part CON2, "Connector"
TP1 TP5 TP6 TP7: library part PAD
U1: "SIMPLE SWITCHER?Power Converter 150 KHz 3A Step-Down Voltage Regulator, 5-pin TO-263"
U2: library part LT2602
U3 U13: library part ADUM1401, "1Mbps Data Rate, 100ns Propagation delay"
U4: library part SP323
U5: library part AD7793
U6: "800mA Low-Dropout Linear Regulator, 4-pin SOT-223"
U9 U14: library part "Header 3", "Programmable Precision Reference"
UH1 UH2 UH3: library part AD8646
VR1: library part "Res Varistor", "Varistor (Voltage-Sensitive Resistor)"
VR2 VR3: library part "D Zener", "Zener Diode"
ZD14 ZD15 ZD16: library part SMBJ, "Ë²±"

## Free pads (board coordinates)
  round 1.5 smd: 0(2.325,6.875) 0(107.75,116.075)
  round 6 hole 3.5: 1(8,40) 1(122,40.35)
  round 5.5 hole 3.2: 1(8,106) 1(122,106) 4(15.069,116.025) 5(115.069,116.1)
  round 5.5 hole 3.5: 1(15.019,3.975) 2(115.044,4)
  oval 0.8x6 hole 0.8 slot 6 at 90 deg: ""(116.425,14.075)

## Via types
v1: diameter 0.7, hole 0.4, TopLayer to BottomLayer, 219 vias
v2: diameter 1, hole 0.6, TopLayer to BottomLayer, 36 vias
v3: diameter 0.6, hole 0.3, TopLayer to BottomLayer, 6 vias

## Nets (pads, with @x,y where several pads share a name; then routed paths per layer and width w, separated by ;. In a path a pad name is that pad's centre, name@x,y a point inside that pad or via, vN(x,y) a via of type N, cw(c..) or ccw(c..) an arc to the next point about the centre after c; other vN are vias at no path point)
24VGND_IN: C01.1 C03.2 C41.2 CA11.2 D3.1 FB8.1 J4.1 J5.3 J6.1 U11.2 U11.3 VR1.2 | length 25.1
  TopLayer w0.8: v1(66.095,19.15) 67.095,20.15 FB8.1@67.17,20.15 v1(67.17,18.35)
  TopLayer w1: C41.2@11.14,46.108 v2@12.737,46.108
  TopLayer w1.5: C01.1@3.895,21.357 D3.1@3.895,23.725 7.097,23.725 VR1.2@7.795,24.423 ; U11.3@22.295,60.013 22.295,65.698 23.842,67.246 27.047,67.246 C03.2@27.07,67.223 ; U11.2@22.369,57.451 U11.3@22.369,59.991
  other v2: 12.745,46.1
232RX: R33.2 U4.13 | length 21
  TopLayer w0.3: R33.2@101.628,75 100.9,75 100.425,75.475 100.425,79.3 106.475,85.35 107.7,85.35 108.5,86.15 108.5,88.825 107.95,89.375 U4.13@106.51,89.375
232TX: R34.2 U4.14 | length 19.7
  TopLayer w0.3: R34.2@101.628,76.825 101.628,79.453 106.55,84.375 107.95,84.375 109.525,85.95 109.525,88.975 108.475,90.025 U4.14@106.51,90.025
+24V: C02.1 C3.1 CA12.1 D7.2 D8.2 D10.2 K1.5 K2.5 K3.5 TP1.1 U1.1 U11.14 | length 170.7
  TopLayer w0.8: K1.5@16.394,40.85 19.217,43.673 D7.2@19.217,45.375 ; K2.5@25.544,40.9 27.517,42.873 D8.2@27.517,45.375 ; D10.2@34.317,45.35 34.317,41.227 K3.5@34.619,40.925
  TopLayer w1.2: C02.1@1.819,70.396 3.544,72.121 3.544,77.02 6.858,80.333 U11.14@7.055,80.333 7.258,80.333 CA12.1@7.258,89 ; TP1.1@3.275,88.9 CA12.1@7.196,88.9 7.196,93 ; C3.1@7.176,93.866 7.176,99.026 14.175,106.025 24.125,106.025 U1.1@25.45,104.7
  BottomLayer w1: K1.5@16.394,40.85 16.394,39.1 16.369,39.075 17.544,37.9 26.719,37.9 ; K2.5@25.544,40.9 25.544,39.075 26.719,37.9 ; K3.5@34.619,40.925 34.619,39.4 33.119,37.9 26.719,37.9
  BottomLayer w1.5: U11.14@7.055,80.333 7.055,83.155 8.275,84.375 26.269,84.375 29.744,80.9 29.744,56.775 16.394,43.425 K1.5@16.394,40.85
  other v2: 7.1,82.625
+24V_IN: F3.1 J6.2 RH2.1 RH3.1 RH5.1 RH12.1 RH13.1 | length 17.7
  TopLayer w0.6: v2(70.3,18.75) RH13.1@70.3,20.125 ; v2(72.225,18.75) 72.225,18.65 RH12.1@72.225,20.1 ; v2(81.4,18.875) RH3.1@81.4,20.225 ; v2(83.2,18.825) RH5.1@83.2,20.25 ; v2(85.025,18.8) RH2.1@85.025,20.25
  TopLayer w1.5: J6.2@11.764,13.05 F3.1@11.764,23.55
A_UART5: F10.2 GDT5.2 GDT6.2 J3.3 | length 23.5
  TopLayer w1: GDT6.2@54.669,28.575 55.944,28.575 57.858,26.661 60.285,26.661 60.285,20.491 60.031,20.237 ; GDT5.2@60.031,22.628 60.031,20.237 ; J3.3@62.604,13.1 60.031,15.673 60.031,20.237
B_UART5: F11.2 GDT4.1 GDT6.1 J3.2 | length 29.4
  TopLayer w1: GDT6.1@49.97,28.575 48.819,28.575 47.09,26.846 44.918,26.846 44.969,26.795 GDT4.1@44.969,22.475 44.969,20.075 47.619,17.425 55.619,17.425 57.524,15.52 J3.2@57.524,13.1
CARD_D: J7.9 J21.15 R1.1 | length 38.8
  TopLayer w0.3: J7.9@71.344,100.85 71.344,99.05 71.644,98.75 R1.1@71.644,96.2 72.494,96.2 72.919,95.775 72.919,90.525 88.925,74.52 J21.15@93.594,74.52
CURA: DH1.2 J4.2 | length 8.8
  TopLayer w1.2: J4.2@88.049,13.1 88.049,17.392 DH1.2@91.235,20.578
CURB: DH3.2 J5.2 | length 8
  TopLayer w1.2: J5.2@72.799,13.1 75.265,15.566 DH3.2@75.265,20.097
DA_CS#: U2.1 U13.14 | length 5.2
  TopLayer w0.305: U2.1@72.373,44.952 72.373,46.633 73.565,47.825 U13.14@73.565,49.654
DA_DIN: U2.3 U13.12 | length 4.7
  TopLayer w0.3: U13.12@71.025,49.654 71.073,49.605 U2.3@71.073,44.952
DA_SCLK: U2.2 U13.13 | length 4.9
  TopLayer w0.3: U2.2@71.723,44.952 71.723,47.179 72.295,47.75 U13.13@72.295,49.654
DAC0: RH1.2 U2.8 | length 3.1
  TopLayer w0.4: U2.8@72.373,40.722 73.098,41.447 RH1.2@75.2,41.447
DAC1: RH11.2 U2.5 | length 2.6
  TopLayer w0.4: RH11.2@68.075,40.175 69.876,40.175 U2.5@70.423,40.722
DE485: J20.12 U12.5 U12.6 | length 37.8
  TopLayer w0.3: v1(47.2,63.025) 47.7,63.025 53.225,57.5 53.225,55.775 ; U12.6@51.955,53.575 51.955,55.23 52.5,55.775 53.225,55.775 ; U12.5@53.225,53.575 53.225,55.775
  BottomLayer w0.3: v1(47.2,63.025) 45.85,63.025 43.319,65.556 43.319,76.45 45.194,78.325 47.36,78.325 J20.12@48.634,79.6
DVDD: C11.1 CA3.1 FB1.2 R6.1 R9.1 R10.1 R12.1 U5.14 | length 22
  TopLayer w0.3: C11.1@96.445,33.975 100.37,33.975 101.106,33.239 U5.14@101.106,30.746
  TopLayer w0.5: R10.1@95.095,30.7 95.095,31.075 96.445,32.425 C11.1@96.445,33.975 96.445,35.873 CA3.1@96.343,35.975
  TopLayer w0.6: R9.1@95.095,25.05 R10.1@95.095,30.7
  TopLayer w0.7: CA3.1@95.495,36.402 95.922,35.975 96.343,35.975 FB1.2@98.373,35.975
EARTH: C01.2 GDT4.2 GDT5.1 J3.1 J5.1 J6.3 pad.1@15.019,3.975 pad.2 ZD15.2 ZD16.1 | length 168.9
  TopLayer w1: GDT4.2@49.871,22.628 52.494,22.628 GDT5.1@55.332,22.628
  TopLayer w1.2: ZD16.1@49.419,33.925 49.619,33.725 ZD15.2@55.92,33.725 ; v2@52.494,20.275 52.494,22.628 52.494,33.625
  TopLayer w1.5: J6.3@6.684,13.05 7.125,13.491 C01.2@7.125,20.4
  BottomLayer w1.2: J3.1@52.444,13.1 52.537,13.192 v2@52.537,20.167
  BottomLayer w1.5: J6.3@6.684,13.05 6.684,10.941 13.7,3.925 15.019,3.925 17.819,6.725 52.444,6.725 ; J3.1@52.444,13.1 52.444,6.725 ; J5.1@67.719,13.1 67.719,7.806 68.8,6.725 ; pad.2@115.044,3.975 112.294,6.725 68.8,6.725 ; 52.444,6.725 68.8,6.725
  other v2: 52.519,20.275
GND: C1.2 C2.2 C03.1 C3.2 C4.1 C7.2 C9.1 C13.2 C15.2 C16.2 C27.1 C28.2 C40.2 C43.2 C44.2 C51.2 C56.2 C58.2 C61.2 C62.2 C63.2 C64.2 C65.2 CA1.2 CA4.2 CA12.2 CA13.2 CA14.2 D1.1 FB4.3 FB7.3 J7.6 J7.10 J8.7 J8.8 J12.6 J20.2 J20.8 J20.10 J20.14 J20.20 J21.6 J21.14 J21.20 LD1.2 P1.2 Q3.2 Q4.2 Q5.2 R29.1 R51.2 R54.2 R58.2 TP7.1 U1.3 U1.5 U1.6 U3.2 U3.8 U4.15 U6.1 U11.16 U12.1 U12.3 U12.9 U12.10 U13.2 U13.8 VR2.1 VR3.1 | length 237.4
  TopLayer w0.4: C40.2@106.372,96.919 C27.1@108.225,96.919 ; U4.15@106.51,90.675 v1@109.15,90.675
  TopLayer w0.5: v1@65.644,93.45 C4.1@65.644,94.825 ; v1(67.195,56.925) 67.215,56.945 U13.8@67.215,58.925 ; v1@69.644,92.375 69.644,91 v1(88.494,72.15) ; U13.2@74.835,58.925 74.835,56.935 v1(74.87,56.9) ; v1@98.005,50.135 U3.8@98.005,52.35 ; v1(105.62,50.3) 105.625,50.305 U3.2@105.625,52.35 ; C1.2@110.545,53.772 C9.1@112.273,53.772 ; C9.1@112.423,53.772 C9.1@112.445,53.75
  TopLayer w0.6: v1(25.144,48.95) 25.192,48.903 R54.2@26.094,48.903 ; R54.2@26.344,48.903 26.822,48.425 Q4.2@28.544,48.425 ; R51.2@30.269,57.528 30.772,57.025 Q3.2@32.844,57.025 ; R58.2@33.094,48.953 v1(33.622,48.425) Q5.2@35.519,48.425 ; CA14.2@41.6,52.432 42.554,52.432 v1(43.297,53.175) C44.2@44.225,54.103 ; v1(44.65,109.625) R29.1@45.844,109.625 45.844,107.678 C16.2@45.847,107.675 ; U12.10@46.875,53.575 46.875,51.495 v1(47.095,51.275) 47.495,51.275 48.145,51.925 U12.9@48.145,53.575 ; C65.2@54.241,84.125 55.969,84.125 v1(55.994,84.15) ; C64.2@54.241,86.3 56.145,86.3 v1(56.169,86.325) ; C63.2@54.241,88.45 56.12,88.45 v1(56.144,88.475) ; C62.2@54.241,90.725 v1(56.069,90.725) ; C61.2@54.241,92.9 56.12,92.9 v1(56.144,92.925) ; U12.3@55.765,53.575 55.765,52.178 56.527,51.416 57.543,51.416 58.305,52.178 U12.1@58.305,53.575 ; v1(57.744,100.05) 57.767,100.073 J7.10@57.767,101.612 ; v1(68.019,99.325) 68.044,99.35 J7.6@68.044,100.85 ; J7.10@72.621,101.612 73.933,100.3 v1(73.969,100.3) ; v1(99.144,97.025) 99.172,96.997 C28.2@100.344,96.997 ; v1(100.394,67.725) C15.2@101.622,67.725 ; v1(106.3,98.225) 106.344,98.18 C40.2@106.344,96.947
  TopLayer w0.7: FB4.3@80.65,89.474 FB4.3@80.657,89.481 80.657,92.237 80.675,92.256 v1(80.675,91.431)
  TopLayer w0.8: VR3.1@24.644,90.125 v1@26.025,90.125 ; v2(28.945,89.88) FB7.3@28.945,92.34 ; v1(55.394,111.35) J7.10@56.994,111.35 ; C43.2@58.417,57.05 v3(59.47,58.103) 59.993,58.626 CA13.2@59.993,59.8 ; J7.10@72.494,111.35 v1(74.294,111.35) ; v1@72.893,67.223 CA4.2@72.893,65.1 72.893,63.052 73.42,62.525 74.398,62.525 C56.2@74.648,62.275 ; U6.1@84.225,98.8 85.4,97.625 v1(85.4,97.306) 85.423,97.283 v1(85.423,93.357) 85.423,92.406 C58.2@85.347,92.331 ; v2(88.5,98.5) C7.2@88.5,100.352 ; v1@114.077,56.82 CA1.2@115.55,55.347 ; CA1.2@115.625,55.872 v1@115.625,57.495
  TopLayer w1: C51.2@24.645,94.922 24.645,97.094 U1.5@25.45,97.9
  TopLayer w1.2: U1.3@25.45,101.3 U1.6@34.9,101.3
  TopLayer w1.5: U11.16@7.055,75.253 10.989,75.253 15.821,70.421 C03.1@26.394,70.421 ; CA12.2@10.244,88.9 TP7.1@13.846,88.9 ; D1.1@14.85,97.675 14.85,97.004 15.554,96.3 C2.2@15.554,93
  BottomLayer w0.4: v1(58.194,71.675) v1(65.669,64.2) 67.069,62.8 v1(73.145,62.8) 74.945,61 75.968,61 79.043,57.925 v1(97.75,57.925) 99.375,57.925 102.4,54.9 v1(106.075,54.9)
  BottomLayer w0.5: v1(65.744,93.35) 66.769,92.325 v1(69.644,92.325) v1(71.894,92.325)
  BottomLayer w0.6: 100.725,72.775 100.125,73.375 100.125,81.1 v1(102.25,83.225)
  other v1: 49.7,50.125 97.995,50.125 55.1,50.175 59.569,50.2 45.675,50.275 52.15,51.2 57.12,51.35 60.05,53.625 111.42,53.725 71.025,55.875 68.775,55.9 114.05,56.82 30.994,57.05 115.575,57.545 51.475,57.65 80.225,57.875 43.35,58.5 61.9,58.925 47.2,59.525 53.75,60.85 42.7,62.7 52.125,64.35 46.25,64.525 68,65.725 72.895,67.225 70.35,68.05 84.275,69.1 81.9,71.75 65.9,72.35 100.275,73.225 105.225,75.325 56.075,75.5 89.725,75.625 74.475,79 79.2,81.4 73.068,84.925 85.369,88.875 64.575,89 26.025,90.15 109.15,90.65 74.05,95.25
  other v2: 15.525,94.825 15.425,96.175 24.675,96.475 35.225,97.225 32.25,97.275 37.95,97.275 35.225,99.1 32.25,99.175 37.925,99.175 37.925,101.1 32.25,101.2 35.225,101.2 28.95,101.325 37.95,103.225 35.225,103.25 32.275,103.275 35.2,105.2 37.95,105.2 32.275,105.225
GND_COM: C45.2 C46.1 CA15.2 CA16.2 R42.2 U12.11 U12.14 U12.16 U12.20 | length 38.7
  TopLayer w0.6: CA15.2@41.695,44.227 42.597,44.227 v1@43.295,44.925 ; v1(43.32,44.95) v1@43.295,44.925 ; U12.11@46.875,43.923 45.598,45.2 C45.2@44.42,45.2 44.144,44.925 v1@43.295,44.925 ; R42.2@49.544,38.947 50.685,40.087 U12.14@50.685,43.923 50.685,45.193 51.441,45.95 52.468,45.95 53.225,45.193 U12.16@53.225,43.923 ; U12.20@58.305,43.923 v1(59.79,43.923) C46.1@60.795,44.928 62.196,43.527 CA16.2@63.475,43.527
  BottomLayer w0.6: v1(45.82,44.925) 50.92,44.925 v1(51.97,45.975) 57.738,45.975 v1(59.79,43.923)
  other v1: 61.7,44
GND_ISO: C8.2 C17.2 C20.2 C24.2 C25.2 C29.1 C31.2 C33.2 C34.2 C35.2 C36.2 C37.2 C38.2 CA2.2 FB3.1 R22.2 U3.9 U3.15 U5.8 U5.10 U5.12 U14.2 U15.10 U15.13 U15.15 U15.16 | length 54.9
  TopLayer w0.3: U5.12@102.406,30.746 102.406,32.511 v1(102.87,32.975) 103.37,32.975 103.706,32.639 U5.10@103.706,30.746 ; v1(113.894,34.725) 113.894,34.672 v1@113.941,34.625 ; U15.16@114.295,33.475 114.295,34.272 v1@113.941,34.625 ; U15.15@114.945,33.475 114.945,34.55 114.869,34.625 ; U15.13@116.245,33.475 116.245,34.225 115.844,34.625 114.869,34.625 ; U15.10@118.195,33.475 118.195,35.195 v1(118.45,35.45) ; v1@113.941,34.625 114.869,34.625
  TopLayer w0.4: U5.8@104.334,24.904 105.391,24.904 v1(105.42,24.875)
  TopLayer w0.5: v1@109.994,37.7 110.269,37.425 C29.1@111.094,37.425 C29.1@110.969,37.3 ; CA2.2@111.32,44.527 CA2.2@111.393,44.6 ; C8.2@114.52,40.628 v3(115.345,40.628) C38.2@116.27,40.628 ; C31.2@118.019,36.703 118.019,35.881 v1(118.45,35.45) ; C37.2@118.572,21.675 v1(118.572,22.697) ; C36.2@123.647,24.9 v1@126.425,24.9 ; C20.2@126.725,46.672 v1(127.897,46.672)
  TopLayer w0.6: v1@99.195,22.15 C17.2@100.548,22.15 ; v1@102.35,36.622 C35.2@103.695,36.622 ; U3.15@105.625,43.079 v1@105.625,45.58 ; R22.2@111.467,22.15 v1(112.62,22.15) ; C33.2@123.85,33.403 125.13,32.123 C34.2@126.55,32.123
  TopLayer w0.7: v1@96.891,43.079 U3.9@98.005,43.079 ; FB3.1@99.77,37.975 100.997,37.975 v1@102.35,36.622 ; v1(109.175,27.025) C25.2@110.303,27.025
  TopLayer w0.8: v1(109.57,43.525) 110.318,43.525 CA2.2@111.32,44.527 112.122,44.527 v1(112.97,45.375) ; C24.2@111.12,32.602 112.692,32.602 v1(112.694,32.6)
  BottomLayer w0.5: v1(118.572,22.697) 120.8,24.925 v1(126.625,24.925) v1(126.625,26.2)
  other v1: 99.17,22.175 124.8,32.525 102.35,36.675 109.994,37.625 96.87,43.1 105.645,45.6 102.75,46.55 104.625,46.55 112.944,46.55 107.5,46.575 109.925,46.575 100.075,46.6 97.344,46.625
GUARD: J2.3 P3.4 U15.4 | length 48.4
  TopLayer w0.3: J2.3@108.379,13.1 110.95,13.1 111.275,13.425 ; P3.4@112.505,19.15 112.505,15.455 111.275,14.225 111.275,13.425 ; P3.4@112.875,19.15 116.245,22.52 U15.4@116.245,26.825 ; U15.4@116.245,27.075 116.245,28.445 116.575,28.775 v3(117.175,28.775) ; v1(118.475,25.15) 118.475,23.85 119.95,22.375 119.95,21 119.4,20.45 116.75,20.45 116.15,19.85 116.15,18.225 115.412,17.488 115.412,12.213 114.325,11.125 112.35,11.125 111.275,12.2 111.275,13.425
  BottomLayer w0.3: v3(117.175,28.775) 117.52,28.775 117.994,28.3 117.994,25.631 v1(118.475,25.15)
IAGND: C5.2 C6.2 C53.2 C54.2 C57.2 CA5.2 CH1.1 CH2.2 CH3.1 CH4.1 CH5.2 CH6.1 FB8.2 RH10.2 RH19.2 U2.7 U9.2 U13.9 U13.15 UH1.4 UH2.4 UH3.4 | length 37.1
  TopLayer w0.5: CH4.1@66.125,40.2 66.125,41.647 C5.2@66.503,42.025 ; v1(66.37,48.003) 66.834,48.003 67.215,48.384 U13.9@67.215,49.654 ; v1(68.025,37.025) 68.045,37.025 UH2.4@69.27,35.8 ; U2.7@71.723,40.722 71.723,41.648 v1(72.225,42.15) ; U13.15@74.835,49.908 U13.15@74.835,49.654 74.835,47.41 v1(74.869,47.375) 74.869,45.052 C6.2@75.2,44.722 ; CH1.1@76.95,41.45 77.525,41.45 v1(78.275,42.2) 79.445,43.37 UH1.4@79.445,43.825 ; RH10.2@79.353,35.675 79.353,34.797 v1(79.8,34.35) ; C57.2@82.669,50.303 C53.2@84.4,50.303 ; v1(83.875,32.225) 83.975,32.225 83.925,32.275 CH6.1@83.925,33.275 ; UH3.4@87.575,30.13 89.205,30.13 v1(89.475,30.4) ; C54.2@88.272,46.425 v1(89.325,46.425) ; CH3.1@89.575,33.4 v1@89.575,34.675 ; CH2.2@91.3,26.023 v1(91.3,27.275)
  TopLayer w0.7: FB8.2@67.17,21.547 v1(67.17,24.769) RH19.2@68.475,26.075 ; CA5.2@79.944,48.627 80.943,48.627 C57.2@82.644,50.328
  TopLayer w0.8: v1(73.65,23.9) 74.6,22.95 CH5.2@75.173,22.95
  other v1: 85.1,24.75 66.4,28.8 67.525,33.35 89.55,34.7 66.125,41.175 74.875,45.95 81.694,49.325 66.5,52.15 68.45,52.15 71.05,52.175 74.894,52.175
IREF2.5V: C6.1 FB2.2 U2.4 | length 7.8
  TopLayer w0.5: U2.4@70.423,44.952 70.423,43.852 70.95,43.325 C6.1@75.2,43.325 75.203,43.328 FB2.2@76.925,43.328
KEY_IN1: C61.1 J12.1 J20.1 R59.1 | length 68.1
  TopLayer w0.3: R59.1@41.119,92.15 45.945,92.15 J20.1@46.094,92.3 46.094,93.175 46.794,93.875 51.87,93.875 C61.1@52.844,92.9 52.769,92.825 52.769,92.175 52.994,91.95 v1(55.419,91.95)
  BottomLayer w0.3: v1(55.419,91.95) 59.775,91.95 89.925,61.8 91.85,61.8 J12.1@93.475,60.175
KEY_IN2: C62.1 J12.2 J20.3 R60.1 | length 63.7
  TopLayer w0.3: R60.1@41.119,90.275 43.769,90.275 44.285,89.76 J20.3@46.094,89.76 47.31,90.975 52.595,90.975 C62.1@52.844,90.725 52.844,89.975 53.244,89.575 v1(55.444,89.575)
  BottomLayer w0.3: v1(55.444,89.575) 61.025,89.575 90.425,60.175 J12.2@90.935,60.175
KEY_IN3: C63.1 J12.3 J20.4 R61.1 | length 61.1
  TopLayer w0.3: R61.1@41.119,88.575 42.42,88.575 v1(42.469,88.625) ; J20.4@48.634,89.76 49.935,89.76 51.244,88.45 C63.1@52.844,88.45 52.844,87.65 53.144,87.35 v1@55.469,87.35
  BottomLayer w0.3: v1(42.469,88.625) 42.644,88.45 47.325,88.45 J20.4@48.634,89.76 ; v1(55.469,87.375) 62.05,87.375 88.395,61.03 J12.3@88.395,60.175
KEY_IN4: C64.1 J12.4 J20.5 R62.1 | length 59.2
  TopLayer w0.3: R62.1@41.119,86.425 43.72,86.425 44.514,87.22 J20.5@46.094,87.22 46.094,87.55 46.969,88.425 49.344,88.425 51.469,86.3 C64.1@52.844,86.3 52.844,85.475 53.119,85.2 55.419,85.2 v1(55.444,85.175)
  BottomLayer w0.3: v1(55.444,85.175) 63,85.175 85.855,62.32 J12.4@85.855,60.175
KEY_IN5: C65.1 J12.5 J20.6 R63.1 | length 57.6
  TopLayer w0.3: R63.1@41.119,84.25 42.969,84.25 44.694,85.975 47.39,85.975 J20.6@48.634,87.22 51.729,84.125 C65.1@52.844,84.125 52.794,84.075 52.794,82.625 v1(52.869,82.55)
  BottomLayer w0.3: v1(52.869,82.55) 52.894,82.525 64.45,82.525 83.315,63.66 J12.5@83.315,60.175
L_AIN: C16.1 J20.7 PQ1.2 R29.2 | length 49.7
  TopLayer w0.3: J20.7@46.094,84.68 47.274,83.5 49.494,83.5 51.369,81.625
  TopLayer w0.4: C16.1@47.224,107.695 47.224,106.276 58.169,95.331 58.169,84.5 55.294,81.625 51.369,81.625
  TopLayer w0.6: C16.1@47.224,107.695 C16.1@47.244,107.675 47.244,109.622 R29.2@47.241,109.625 47.241,114.032 PQ1.2@47.994,114.785
LCD_BUSY: D6.1 J21.10 R32.2 | length 24.4
  TopLayer w0.3: D6.1@87.425,82.152 88.652,80.925 94.92,80.925 J21.10@96.134,82.14
  TopLayer w0.4: J21.10@96.134,82.14 97.26,82.14 98.6,80.8 98.6,72.925 101.225,70.3 ; R32.2@101.574,70.323 R32.2@101.622,70.275 R32.2@101.669,70.275
LED_S1: J21.7 R37.1 | length 32.7
  TopLayer w0.3: R37.1@86.794,110.675 90.1,110.675 92.125,108.65 92.125,89.175 92.725,88.575 94.244,88.575 94.844,87.975 94.844,85.93 J21.7@93.594,84.68
LED_S2: J21.5 R36.1 | length 32.7
  TopLayer w0.3: R36.1@81.969,110.65 83.345,109.275 89.5,109.275 91.45,107.325 91.45,87.975 92.205,87.22 J21.5@93.594,87.22
MCU_RXD1: J21.8 U4.12 | length 12.1
  TopLayer w0.3: J21.8@96.134,84.68 100.974,84.68 105.019,88.725 U4.12@106.51,88.725
MCU_TXD1: J21.9 U4.11 | length 15.4
  TopLayer w0.3: J21.9@93.594,82.14 94.83,83.375 100.7,83.375 105.4,88.075 U4.11@106.51,88.075
MISO1: J20.18 R13.2 R44.2 U3.6 | length 68.9
  TopLayer w0.25: v1(100.47,50.3) 100.545,50.375 U3.6@100.545,52.35
  TopLayer w0.3: v1(51.494,71.975) 52.619,70.85 R44.2@52.947,70.85 ; R13.2@100,55.628 100.545,55.083 U3.6@100.545,52.35
  BottomLayer w0.25: v1(100.47,50.3) v1@100.52,50.3
  BottomLayer w0.3: J20.18@48.634,71.98 52.995,71.98 66.275,58.7 74.975,58.7 78.225,55.45 96.3,55.45 100.47,51.28 v1(100.47,50.3)
MISO2: J7.7 J21.17 R14.1 | length 41.4
  TopLayer w0.3: J7.7@69.144,100.85 69.144,99.075 69.694,98.525 R14.1@69.694,96.2 70.369,96.2 70.669,95.9 70.669,91.525 90.215,71.98 J21.17@93.594,71.98
MOSI1: J20.17 R11.2 R43.2 U3.5 U13.5 | length 75.6
  TopLayer w0.25: U13.5@71.019,58.92 U13.5@71.025,58.925 ; v1(101.795,50.3) 101.815,50.32 U3.5@101.815,52.35
  TopLayer w0.3: v1(51.719,73.225) 52.244,72.7 R43.2@52.947,72.7 ; U13.5@71.025,58.925 v1(71.025,60.925) ; R11.2@101.69,55.593 R11.2@101.725,55.628 ; U3.5@101.815,52.35 R11.2@101.815,55.818
  BottomLayer w0.25: v1(101.795,50.3) v1@101.82,50.3
  BottomLayer w0.3: J20.17@46.094,71.98 47.34,73.225 v1(51.719,73.225) 53.144,73.225 65.444,60.925 v1(71.025,60.925) 72.375,59.575 75.3,59.575 78.575,56.3 97.225,56.3 101.795,51.73 v1(101.795,50.3)
MOSI2: J7.3 J21.16 R17.1 | length 60.2
  TopLayer w0.3: J7.3@64.744,100.85 64.744,99.1 63.594,97.95 R17.1@63.594,96.225 64.294,96.225 64.669,95.85 64.669,92.006 73.95,82.725 75.144,82.725 89.944,67.925 97.194,67.925 97.844,68.575 97.844,72.81 J21.16@96.134,74.52
NetC2_1: C2.1 C51.1 FB7.1 L1.2 U1.4 VR3.2 | length 20.4
  TopLayer w0.8: C2.1@21.65,93.525 22.075,93.1 24.22,93.1 C51.1@24.645,93.525 24.645,92.45 ; VR3.2@24.644,91.522 24.645,92.45 ; FB7.1@27.802,92.34 24.754,92.34 24.645,92.45
  TopLayer w1: C2.1@21.65,93 20.075,94.575 L1.2@20.075,98.301 21.374,99.6 U1.4@25.45,99.6
NetC02_2: C02.2 L3.2 U11.22 U11.23 | length 23.6
  TopLayer w1.5: C02.2@2.045,67.221 4.821,67.221 6.95,65.093 6.95,57.844 4.37,55.263 L3.2@4.37,48.31
NetC11_2: C11.2 CA3.2 FB3.2 | length 10.5
  TopLayer w0.6: C11.2@95.048,33.975 93.645,35.378 93.645,38.102 CA3.2@95.232,39.69 ; CA3.2@95.585,39.69 97.3,37.975 FB3.2@98.373,37.975
NetC13_1: C13.1 C58.1 FB4.1 U6.2 U6.4 VR2.2 | length 19.7
  TopLayer w1: U6.4@78.425,101.1 U6.2@84.225,101.1 ; 81.2,100.975 81.2,96.405 C13.1@82.2,95.406 82.122,95.328 82.122,92.306 C58.1@83.925,92.306 ; FB4.1@81.79,89.473 82.072,89.755 VR2.2@82.072,92.306
NetC15_1: C15.1 FB5.1 J8.1 J8.2 | length 9.7
  TopLayer w0.8: FB5.1@103.019,65.625 C15.1@103.019,67.725 108.031,67.725 J8.2@108.041,67.715
  TopLayer w1: J8.1@108.041,65.175 J8.2@108.041,67.715
NetC17_1: C17.1 R3.2 U5.7 | length 4.6
  TopLayer w0.3: R3.2@103.584,22.239 R3.2@103.673,22.15 ; R3.2@103.684,22.15 U5.7@103.684,24.904
  TopLayer w0.5: C17.1@101.945,22.15 R3.2@103.673,22.15